# EAGLE board MMA8452Q_Breakout-Panel-v10 (EAGLE 6.5.0), part 1 of 2
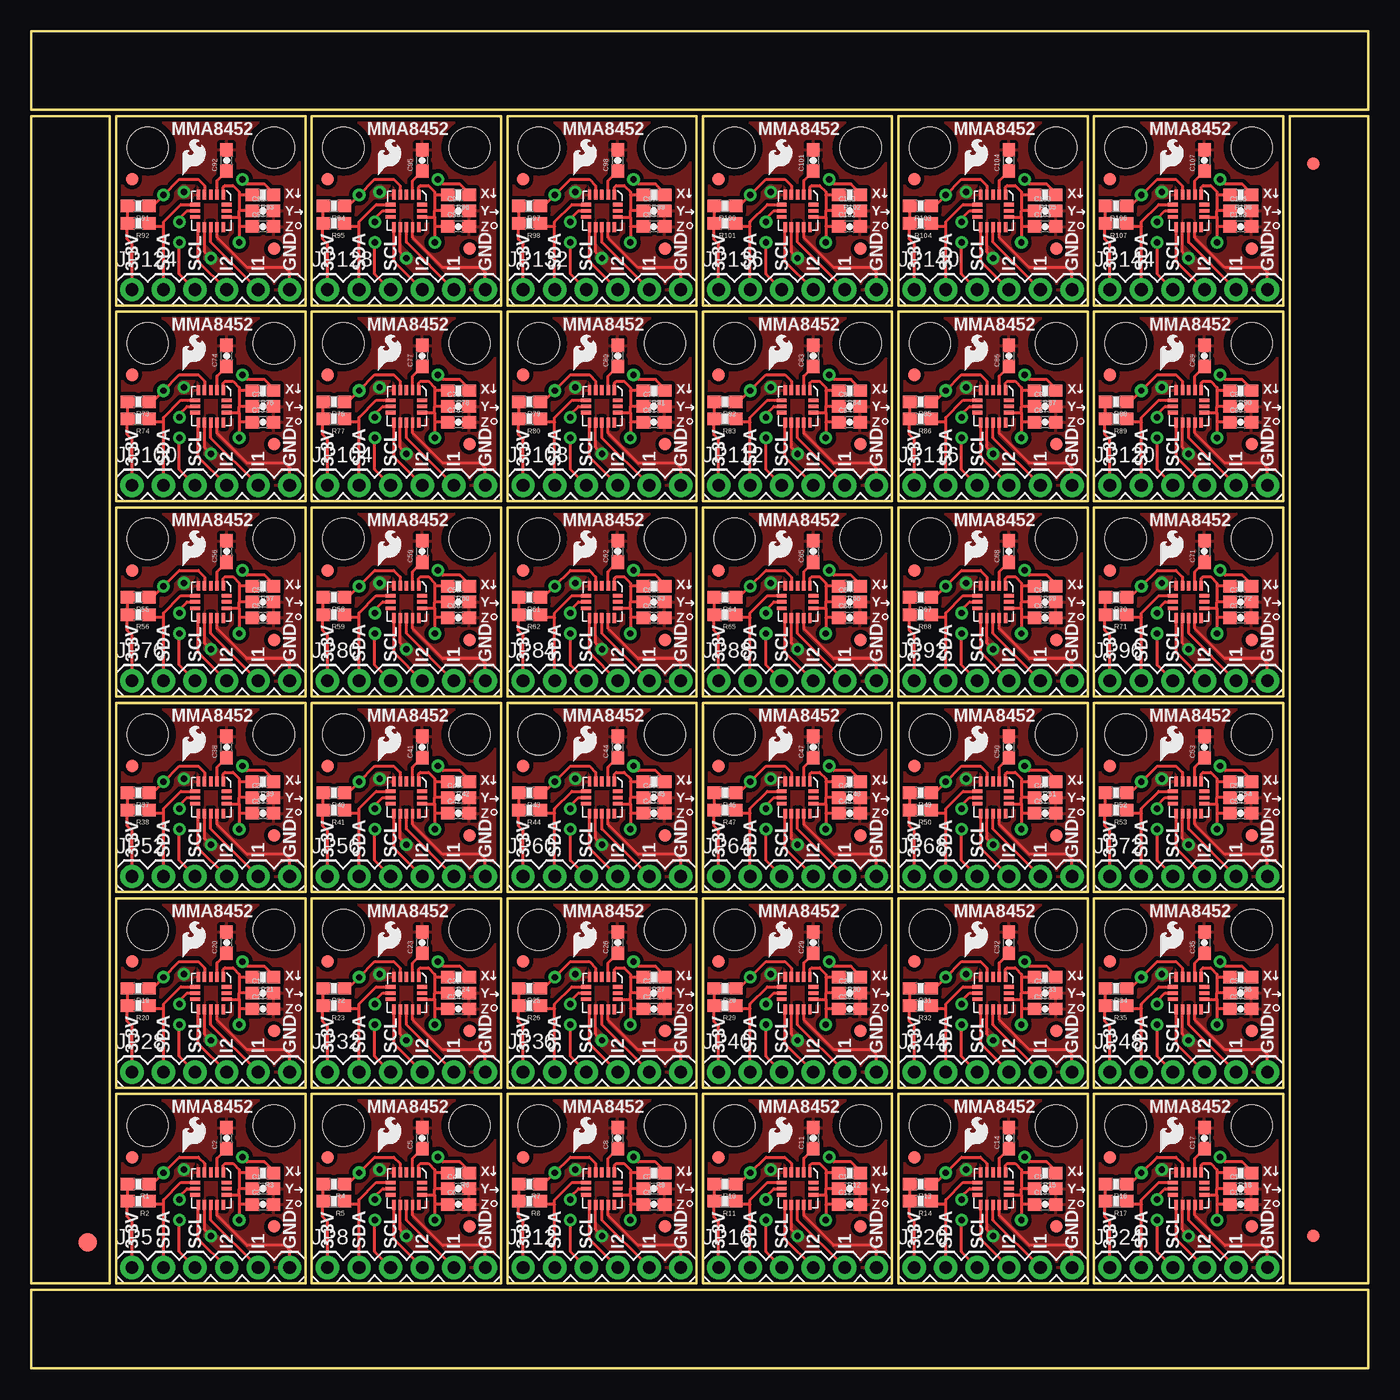
[diagram p0: board, top side]
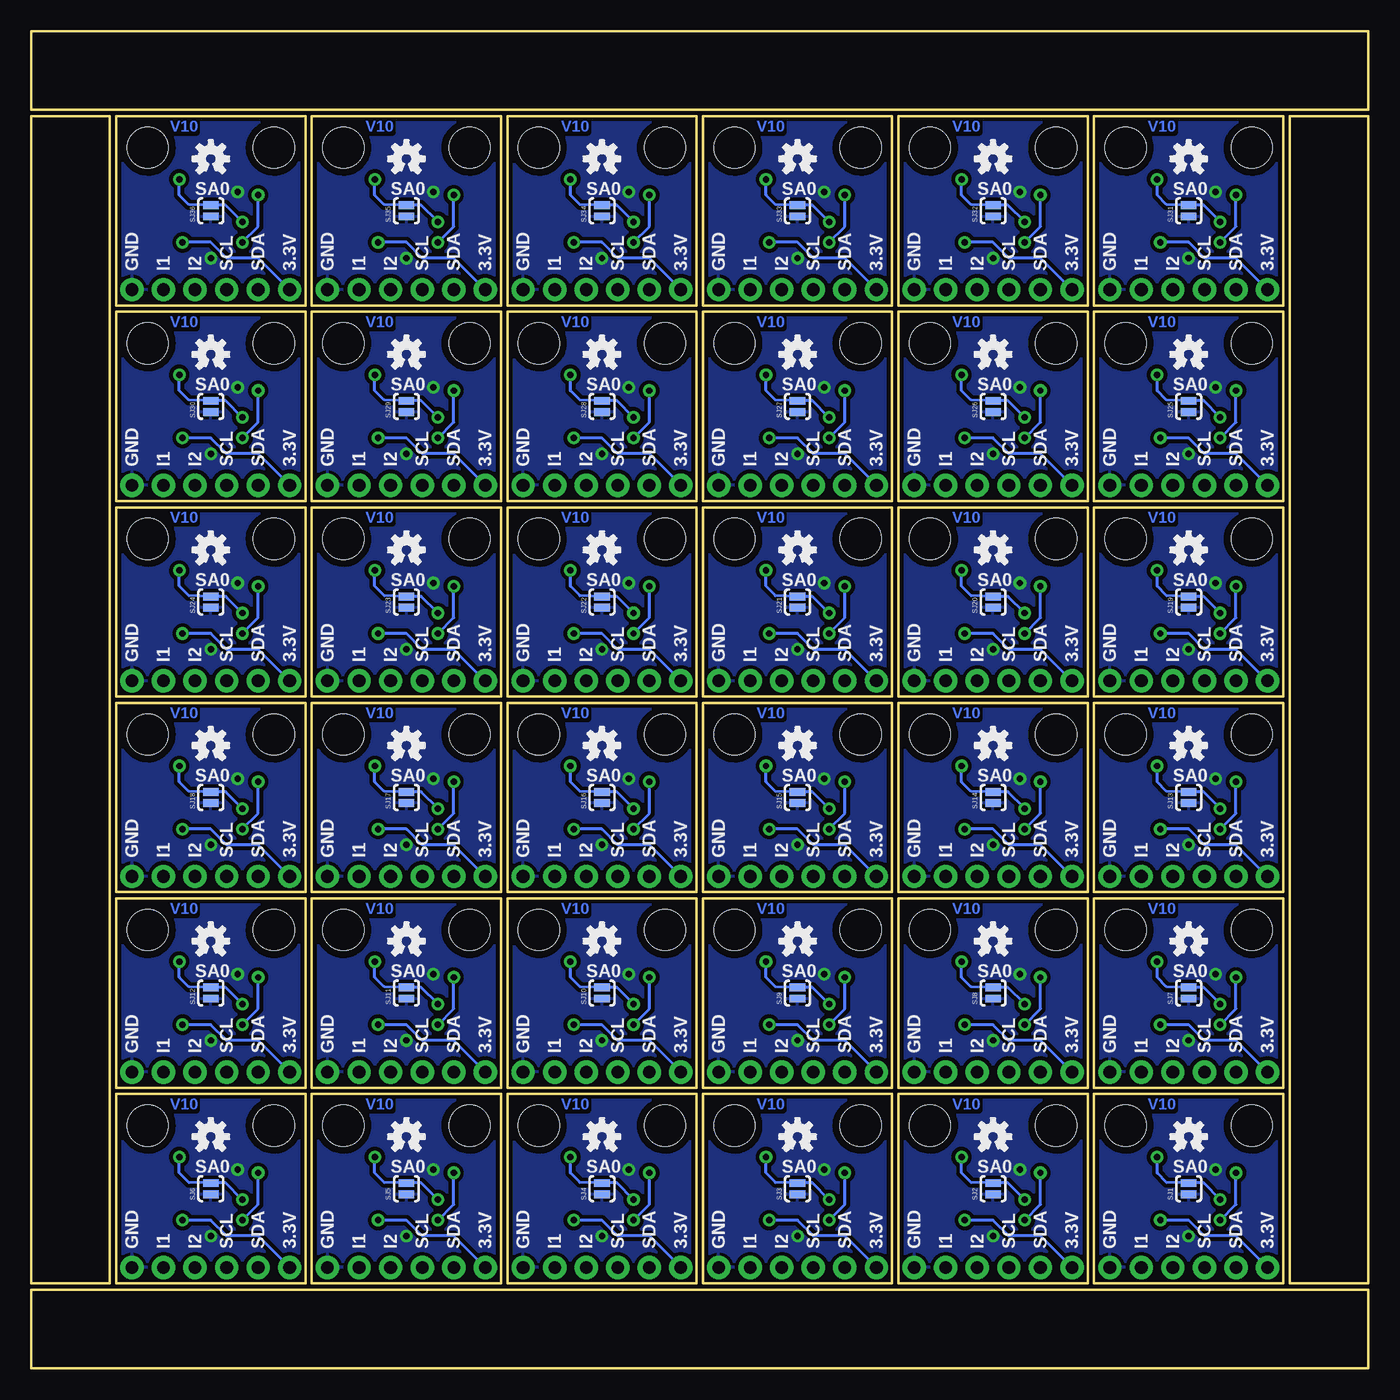
[diagram p1: board, bottom side, seen from below]

Size 107.7 x 107.7 mm. Coordinates in mm from the lower left corner, seen from the top.
Outline: 6.35,79.25 6.35,6.86 0,6.86 0,29.72
Outline: 79.25,0 0,0 0,6.35 29.72,6.35
Outline: 28.45,6.35 107.7,6.35 107.7,0 77.98,0
Outline: 107.7,79.25 107.7,6.86 101.35,6.86 101.35,29.72
Outline: 28.45,107.7 107.7,107.7 107.7,101.35 77.98,101.35
Outline: 101.35,28.45 101.35,100.84 107.7,100.84 107.7,77.98
Outline: 79.25,101.35 0,101.35 0,107.7 29.72,107.7
Outline: 0,28.45 0,100.84 6.35,100.84 6.35,77.98
Outline: 6.86,6.86 6.86,22.1 22.1,22.1 22.1,6.86 6.86,6.86
Outline: 22.61,6.86 22.61,22.1 37.85,22.1 37.85,6.86 22.61,6.86
Outline: 38.35,6.86 38.35,22.1 53.59,22.1 53.59,6.86 38.35,6.86
Outline: 54.1,6.86 54.1,22.1 69.34,22.1 69.34,6.86 54.1,6.86
Outline: 69.85,6.86 69.85,22.1 85.09,22.1 85.09,6.86 69.85,6.86
Outline: 85.6,6.86 85.6,22.1 100.84,22.1 100.84,6.86 85.6,6.86
Outline: 6.86,22.61 6.86,37.85 22.1,37.85 22.1,22.61 6.86,22.61
Outline: 22.61,22.61 22.61,37.85 37.85,37.85 37.85,22.61 22.61,22.61
Outline: 38.35,22.61 38.35,37.85 53.59,37.85 53.59,22.61 38.35,22.61
Outline: 54.1,22.61 54.1,37.85 69.34,37.85 69.34,22.61 54.1,22.61
Outline: 69.85,22.61 69.85,37.85 85.09,37.85 85.09,22.61 69.85,22.61
Outline: 85.6,22.61 85.6,37.85 100.84,37.85 100.84,22.61 85.6,22.61
Outline: 6.86,38.35 6.86,53.59 22.1,53.59 22.1,38.35 6.86,38.35
Outline: 22.61,38.35 22.61,53.59 37.85,53.59 37.85,38.35 22.61,38.35
Outline: 38.35,38.35 38.35,53.59 53.59,53.59 53.59,38.35 38.35,38.35
Outline: 54.1,38.35 54.1,53.59 69.34,53.59 69.34,38.35 54.1,38.35
Outline: 69.85,38.35 69.85,53.59 85.09,53.59 85.09,38.35 69.85,38.35
Outline: 85.6,38.35 85.6,53.59 100.84,53.59 100.84,38.35 85.6,38.35
Outline: 6.86,54.1 6.86,69.34 22.1,69.34 22.1,54.1 6.86,54.1
Outline: 22.61,54.1 22.61,69.34 37.85,69.34 37.85,54.1 22.61,54.1
Outline: 38.35,54.1 38.35,69.34 53.59,69.34 53.59,54.1 38.35,54.1
Outline: 54.1,54.1 54.1,69.34 69.34,69.34 69.34,54.1 54.1,54.1
Outline: 69.85,54.1 69.85,69.34 85.09,69.34 85.09,54.1 69.85,54.1
Outline: 85.6,54.1 85.6,69.34 100.84,69.34 100.84,54.1 85.6,54.1
Outline: 6.86,69.85 6.86,85.09 22.1,85.09 22.1,69.85 6.86,69.85
Outline: 22.61,69.85 22.61,85.09 37.85,85.09 37.85,69.85 22.61,69.85
Outline: 38.35,69.85 38.35,85.09 53.59,85.09 53.59,69.85 38.35,69.85
Outline: 54.1,69.85 54.1,85.09 69.34,85.09 69.34,69.85 54.1,69.85
Outline: 69.85,69.85 69.85,85.09 85.09,85.09 85.09,69.85 69.85,69.85
Outline: 85.6,69.85 85.6,85.09 100.84,85.09 100.84,69.85 85.6,69.85
Outline: 6.86,85.6 6.86,100.84 22.1,100.84 22.1,85.6 6.86,85.6
Outline: 22.61,85.6 22.61,100.84 37.85,100.84 37.85,85.6 22.61,85.6
Outline: 38.35,85.6 38.35,100.84 53.59,100.84 53.59,85.6 38.35,85.6
Outline: 54.1,85.6 54.1,100.84 69.34,100.84 69.34,85.6 54.1,85.6
Outline: 69.85,85.6 69.85,100.84 85.09,100.84 85.09,85.6 69.85,85.6
Outline: 85.6,85.6 85.6,100.84 100.84,100.84 100.84,85.6 85.6,85.6
Copper layers (1*16): Top 0.035mm / dielectric 1.5mm / Bottom 0.035mm
Design rules "SparkFun": minimum track width 8mil, minimum drill 20mil, track to track 8mil, track to pad 8mil, pad to pad 8mil, via to via 8mil, smd to smd 8mil, copper to edge 8mil, drill to drill 8mil, minimum pad ring 12mil, minimum via ring 10mil, stop-mask expansion 4mil, vias tented up to drill 20mil, thermal gap 10mil

## Footprints (pad centres in the part's own frame; a part is rotated, then mirrored left to right if it is on the bottom)
0603-CAP = smd 1.1 x 1: 1 -0.85,0; 2 0.85,0
FIDUCIAL-1.5X3 = smd 1.5 x 1.5: 1 0,0
FIDUCIAL-1X2 = smd 1 x 1: 1 0,0
STAND-OFF = hole 3.302: 0,0
1X06 = drill 1.016 pad 1.88: 1 0,0; 2 2.54,0; 3 5.08,0; 4 7.62,0; 5 10.16,0; 6 12.7,0
0603-RES = smd 1.1 x 1: 1 -0.85,0; 2 0.85,0
SJ_2S-NO = smd 0.635 x 1.27: 1 -0.45,0; 2 0.45,0
MMA8452Q-1:1 = smd 0.8 x 0.275: 1 -1.3,1; 2 -1.3,0.5; 3 -1.3,0; 4 -1.3,-0.5; 5 -1.3,-1; 9 1.3,-1; 10 1.3,-0.5; 11 1.3,0; 12 1.3,0.5; 13 1.3,1 | smd 0.29 x 0.8: 6 -0.5,-1.275; 7 0,-1.275; 8 0.5,-1.275; 14 0.5,1.275; 15 0,1.275; 16 -0.5,1.275

## Placement (x,y rotation side)
C1  0.1uF  [0603-CAP]  18.67,14.48 0 top
C2  0.1uF  [0603-CAP]  15.75,18.54 90 top
C3  4.7uF  [0603-CAP]  18.67,13.21 0 top
C4  0.1uF  [0603-CAP]  34.42,14.48 0 top
C5  0.1uF  [0603-CAP]  31.5,18.54 90 top
C6  4.7uF  [0603-CAP]  34.42,13.21 0 top
C7  0.1uF  [0603-CAP]  50.16,14.48 0 top
C8  0.1uF  [0603-CAP]  47.24,18.54 90 top
C9  4.7uF  [0603-CAP]  50.16,13.21 0 top
C10  0.1uF  [0603-CAP]  65.91,14.48 0 top
C11  0.1uF  [0603-CAP]  62.99,18.54 90 top
C12  4.7uF  [0603-CAP]  65.91,13.21 0 top
C13  0.1uF  [0603-CAP]  81.66,14.48 0 top
C14  0.1uF  [0603-CAP]  78.74,18.54 90 top
C15  4.7uF  [0603-CAP]  81.66,13.21 0 top
C16  0.1uF  [0603-CAP]  97.41,14.48 0 top
C17  0.1uF  [0603-CAP]  94.49,18.54 90 top
C18  4.7uF  [0603-CAP]  97.41,13.21 0 top
C19  0.1uF  [0603-CAP]  18.67,30.23 0 top
C20  0.1uF  [0603-CAP]  15.75,34.29 90 top
C21  4.7uF  [0603-CAP]  18.67,28.96 0 top
C22  0.1uF  [0603-CAP]  34.42,30.23 0 top
C23  0.1uF  [0603-CAP]  31.5,34.29 90 top
C24  4.7uF  [0603-CAP]  34.42,28.96 0 top
C25  0.1uF  [0603-CAP]  50.16,30.23 0 top
C26  0.1uF  [0603-CAP]  47.24,34.29 90 top
C27  4.7uF  [0603-CAP]  50.16,28.96 0 top
C28  0.1uF  [0603-CAP]  65.91,30.23 0 top
C29  0.1uF  [0603-CAP]  62.99,34.29 90 top
C30  4.7uF  [0603-CAP]  65.91,28.96 0 top
C31  0.1uF  [0603-CAP]  81.66,30.23 0 top
C32  0.1uF  [0603-CAP]  78.74,34.29 90 top
C33  4.7uF  [0603-CAP]  81.66,28.96 0 top
C34  0.1uF  [0603-CAP]  97.41,30.23 0 top
C35  0.1uF  [0603-CAP]  94.49,34.29 90 top
C36  4.7uF  [0603-CAP]  97.41,28.96 0 top
C37  0.1uF  [0603-CAP]  18.67,45.97 0 top
C38  0.1uF  [0603-CAP]  15.75,50.04 90 top
C39  4.7uF  [0603-CAP]  18.67,44.7 0 top
C40  0.1uF  [0603-CAP]  34.42,45.97 0 top
C41  0.1uF  [0603-CAP]  31.5,50.04 90 top
C42  4.7uF  [0603-CAP]  34.42,44.7 0 top
C43  0.1uF  [0603-CAP]  50.16,45.97 0 top
C44  0.1uF  [0603-CAP]  47.24,50.04 90 top
C45  4.7uF  [0603-CAP]  50.16,44.7 0 top
C46  0.1uF  [0603-CAP]  65.91,45.97 0 top
C47  0.1uF  [0603-CAP]  62.99,50.04 90 top
C48  4.7uF  [0603-CAP]  65.91,44.7 0 top
C49  0.1uF  [0603-CAP]  81.66,45.97 0 top
C50  0.1uF  [0603-CAP]  78.74,50.04 90 top
C51  4.7uF  [0603-CAP]  81.66,44.7 0 top
C52  0.1uF  [0603-CAP]  97.41,45.97 0 top
C53  0.1uF  [0603-CAP]  94.49,50.04 90 top
C54  4.7uF  [0603-CAP]  97.41,44.7 0 top
C55  0.1uF  [0603-CAP]  18.67,61.72 0 top
C56  0.1uF  [0603-CAP]  15.75,65.79 90 top
C57  4.7uF  [0603-CAP]  18.67,60.45 0 top
C58  0.1uF  [0603-CAP]  34.42,61.72 0 top
C59  0.1uF  [0603-CAP]  31.5,65.79 90 top
C60  4.7uF  [0603-CAP]  34.42,60.45 0 top
C61  0.1uF  [0603-CAP]  50.16,61.72 0 top
C62  0.1uF  [0603-CAP]  47.24,65.79 90 top
C63  4.7uF  [0603-CAP]  50.16,60.45 0 top
C64  0.1uF  [0603-CAP]  65.91,61.72 0 top
C65  0.1uF  [0603-CAP]  62.99,65.79 90 top
C66  4.7uF  [0603-CAP]  65.91,60.45 0 top
C67  0.1uF  [0603-CAP]  81.66,61.72 0 top
C68  0.1uF  [0603-CAP]  78.74,65.79 90 top
C69  4.7uF  [0603-CAP]  81.66,60.45 0 top
C70  0.1uF  [0603-CAP]  97.41,61.72 0 top
C71  0.1uF  [0603-CAP]  94.49,65.79 90 top
C72  4.7uF  [0603-CAP]  97.41,60.45 0 top
C73  0.1uF  [0603-CAP]  18.67,77.47 0 top
C74  0.1uF  [0603-CAP]  15.75,81.53 90 top
C75  4.7uF  [0603-CAP]  18.67,76.2 0 top
C76  0.1uF  [0603-CAP]  34.42,77.47 0 top
C77  0.1uF  [0603-CAP]  31.5,81.53 90 top
C78  4.7uF  [0603-CAP]  34.42,76.2 0 top
C79  0.1uF  [0603-CAP]  50.16,77.47 0 top
C80  0.1uF  [0603-CAP]  47.24,81.53 90 top
C81  4.7uF  [0603-CAP]  50.16,76.2 0 top
C82  0.1uF  [0603-CAP]  65.91,77.47 0 top
C83  0.1uF  [0603-CAP]  62.99,81.53 90 top
C84  4.7uF  [0603-CAP]  65.91,76.2 0 top
C85  0.1uF  [0603-CAP]  81.66,77.47 0 top
C86  0.1uF  [0603-CAP]  78.74,81.53 90 top
C87  4.7uF  [0603-CAP]  81.66,76.2 0 top
C88  0.1uF  [0603-CAP]  97.41,77.47 0 top
C89  0.1uF  [0603-CAP]  94.49,81.53 90 top
C90  4.7uF  [0603-CAP]  97.41,76.2 0 top
C91  0.1uF  [0603-CAP]  18.67,93.22 0 top
C92  0.1uF  [0603-CAP]  15.75,97.28 90 top
C93  4.7uF  [0603-CAP]  18.67,91.95 0 top
C94  0.1uF  [0603-CAP]  34.42,93.22 0 top
C95  0.1uF  [0603-CAP]  31.5,97.28 90 top
C96  4.7uF  [0603-CAP]  34.42,91.95 0 top
C97  0.1uF  [0603-CAP]  50.16,93.22 0 top
C98  0.1uF  [0603-CAP]  47.24,97.28 90 top
C99  4.7uF  [0603-CAP]  50.16,91.95 0 top
C100  0.1uF  [0603-CAP]  65.91,93.22 0 top
C101  0.1uF  [0603-CAP]  62.99,97.28 90 top
C102  4.7uF  [0603-CAP]  65.91,91.95 0 top
C103  0.1uF  [0603-CAP]  81.66,93.22 0 top
C104  0.1uF  [0603-CAP]  78.74,97.28 90 top
C105  4.7uF  [0603-CAP]  81.66,91.95 0 top
C106  0.1uF  [0603-CAP]  97.41,93.22 0 top
C107  0.1uF  [0603-CAP]  94.49,97.28 90 top
C108  4.7uF  [0603-CAP]  97.41,91.95 0 top
E$1  [FIDUCIAL-1.5X3]  4.57,10.16 0 top
E$4  [FIDUCIAL-1X2]  103.25,10.67 0 top
E$6  [FIDUCIAL-1X2]  103.25,97.03 180 top
FID1  FIDUCIAL1X2  [FIDUCIAL-1X2]  8.13,17.02 0 top
FID2  FIDUCIAL1X2  [FIDUCIAL-1X2]  19.56,11.43 0 top
FID3  FIDUCIAL1X2  [FIDUCIAL-1X2]  23.88,17.02 0 top
FID4  FIDUCIAL1X2  [FIDUCIAL-1X2]  35.31,11.43 0 top
FID5  FIDUCIAL1X2  [FIDUCIAL-1X2]  39.62,17.02 0 top
FID6  FIDUCIAL1X2  [FIDUCIAL-1X2]  51.05,11.43 0 top
FID7  FIDUCIAL1X2  [FIDUCIAL-1X2]  55.37,17.02 0 top
FID8  FIDUCIAL1X2  [FIDUCIAL-1X2]  66.8,11.43 0 top
FID9  FIDUCIAL1X2  [FIDUCIAL-1X2]  71.12,17.02 0 top
FID10  FIDUCIAL1X2  [FIDUCIAL-1X2]  82.55,11.43 0 top
FID11  FIDUCIAL1X2  [FIDUCIAL-1X2]  86.87,17.02 0 top
FID12  FIDUCIAL1X2  [FIDUCIAL-1X2]  98.3,11.43 0 top
FID13  FIDUCIAL1X2  [FIDUCIAL-1X2]  8.13,32.77 0 top
FID14  FIDUCIAL1X2  [FIDUCIAL-1X2]  19.56,27.18 0 top
FID15  FIDUCIAL1X2  [FIDUCIAL-1X2]  23.88,32.77 0 top
FID16  FIDUCIAL1X2  [FIDUCIAL-1X2]  35.31,27.18 0 top
FID17  FIDUCIAL1X2  [FIDUCIAL-1X2]  39.62,32.77 0 top
FID18  FIDUCIAL1X2  [FIDUCIAL-1X2]  51.05,27.18 0 top
FID19  FIDUCIAL1X2  [FIDUCIAL-1X2]  55.37,32.77 0 top
FID20  FIDUCIAL1X2  [FIDUCIAL-1X2]  66.8,27.18 0 top
FID21  FIDUCIAL1X2  [FIDUCIAL-1X2]  71.12,32.77 0 top
FID22  FIDUCIAL1X2  [FIDUCIAL-1X2]  82.55,27.18 0 top
FID23  FIDUCIAL1X2  [FIDUCIAL-1X2]  86.87,32.77 0 top
FID24  FIDUCIAL1X2  [FIDUCIAL-1X2]  98.3,27.18 0 top
FID25  FIDUCIAL1X2  [FIDUCIAL-1X2]  8.13,48.51 0 top
FID26  FIDUCIAL1X2  [FIDUCIAL-1X2]  19.56,42.93 0 top
FID27  FIDUCIAL1X2  [FIDUCIAL-1X2]  23.88,48.51 0 top
FID28  FIDUCIAL1X2  [FIDUCIAL-1X2]  35.31,42.93 0 top
FID29  FIDUCIAL1X2  [FIDUCIAL-1X2]  39.62,48.51 0 top
FID30  FIDUCIAL1X2  [FIDUCIAL-1X2]  51.05,42.93 0 top
FID31  FIDUCIAL1X2  [FIDUCIAL-1X2]  55.37,48.51 0 top
FID32  FIDUCIAL1X2  [FIDUCIAL-1X2]  66.8,42.93 0 top
FID33  FIDUCIAL1X2  [FIDUCIAL-1X2]  71.12,48.51 0 top
FID34  FIDUCIAL1X2  [FIDUCIAL-1X2]  82.55,42.93 0 top
FID35  FIDUCIAL1X2  [FIDUCIAL-1X2]  86.87,48.51 0 top
FID36  FIDUCIAL1X2  [FIDUCIAL-1X2]  98.3,42.93 0 top
FID37  FIDUCIAL1X2  [FIDUCIAL-1X2]  8.13,64.26 0 top
FID38  FIDUCIAL1X2  [FIDUCIAL-1X2]  19.56,58.67 0 top
FID39  FIDUCIAL1X2  [FIDUCIAL-1X2]  23.88,64.26 0 top
FID40  FIDUCIAL1X2  [FIDUCIAL-1X2]  35.31,58.67 0 top
FID41  FIDUCIAL1X2  [FIDUCIAL-1X2]  39.62,64.26 0 top
FID42  FIDUCIAL1X2  [FIDUCIAL-1X2]  51.05,58.67 0 top
FID43  FIDUCIAL1X2  [FIDUCIAL-1X2]  55.37,64.26 0 top
FID44  FIDUCIAL1X2  [FIDUCIAL-1X2]  66.8,58.67 0 top
FID45  FIDUCIAL1X2  [FIDUCIAL-1X2]  71.12,64.26 0 top
FID46  FIDUCIAL1X2  [FIDUCIAL-1X2]  82.55,58.67 0 top
FID47  FIDUCIAL1X2  [FIDUCIAL-1X2]  86.87,64.26 0 top
FID48  FIDUCIAL1X2  [FIDUCIAL-1X2]  98.3,58.67 0 top
FID49  FIDUCIAL1X2  [FIDUCIAL-1X2]  8.13,80.01 0 top
FID50  FIDUCIAL1X2  [FIDUCIAL-1X2]  19.56,74.42 0 top
FID51  FIDUCIAL1X2  [FIDUCIAL-1X2]  23.88,80.01 0 top
FID52  FIDUCIAL1X2  [FIDUCIAL-1X2]  35.31,74.42 0 top
FID53  FIDUCIAL1X2  [FIDUCIAL-1X2]  39.62,80.01 0 top
FID54  FIDUCIAL1X2  [FIDUCIAL-1X2]  51.05,74.42 0 top
FID55  FIDUCIAL1X2  [FIDUCIAL-1X2]  55.37,80.01 0 top
FID56  FIDUCIAL1X2  [FIDUCIAL-1X2]  66.8,74.42 0 top
FID57  FIDUCIAL1X2  [FIDUCIAL-1X2]  71.12,80.01 0 top
FID58  FIDUCIAL1X2  [FIDUCIAL-1X2]  82.55,74.42 0 top
FID59  FIDUCIAL1X2  [FIDUCIAL-1X2]  86.87,80.01 0 top
FID60  FIDUCIAL1X2  [FIDUCIAL-1X2]  98.3,74.42 0 top
FID61  FIDUCIAL1X2  [FIDUCIAL-1X2]  8.13,95.76 0 top
FID62  FIDUCIAL1X2  [FIDUCIAL-1X2]  19.56,90.17 0 top
FID63  FIDUCIAL1X2  [FIDUCIAL-1X2]  23.88,95.76 0 top
FID64  FIDUCIAL1X2  [FIDUCIAL-1X2]  35.31,90.17 0 top
FID65  FIDUCIAL1X2  [FIDUCIAL-1X2]  39.62,95.76 0 top
FID66  FIDUCIAL1X2  [FIDUCIAL-1X2]  51.05,90.17 0 top
FID67  FIDUCIAL1X2  [FIDUCIAL-1X2]  55.37,95.76 0 top
FID68  FIDUCIAL1X2  [FIDUCIAL-1X2]  66.8,90.17 0 top
FID69  FIDUCIAL1X2  [FIDUCIAL-1X2]  71.12,95.76 0 top
FID70  FIDUCIAL1X2  [FIDUCIAL-1X2]  82.55,90.17 0 top
FID71  FIDUCIAL1X2  [FIDUCIAL-1X2]  86.87,95.76 0 top
FID72  FIDUCIAL1X2  [FIDUCIAL-1X2]  98.3,90.17 0 top
JP1  LOGO-SFESK  [SFE-LOGO-FLAME]  12.19,17.4 0 top
JP2  LOGO-SFESK  [SFE-LOGO-FLAME]  27.94,17.4 0 top
JP3  STAND-OFF  [STAND-OFF]  9.4,19.56 0 top
JP4  STAND-OFF  [STAND-OFF]  19.56,19.56 0 top
JP5  [1X06]  8.13,8.13 0 top
JP6  STAND-OFF  [STAND-OFF]  25.15,19.56 0 top
JP7  STAND-OFF  [STAND-OFF]  35.31,19.56 0 top
JP8  [1X06]  23.88,8.13 0 top
JP9  LOGO-SFESK  [SFE-LOGO-FLAME]  43.69,17.4 0 top
JP10  STAND-OFF  [STAND-OFF]  40.89,19.56 0 top
JP11  STAND-OFF  [STAND-OFF]  51.05,19.56 0 top
JP12  [1X06]  39.62,8.13 0 top
JP13  LOGO-SFESK  [SFE-LOGO-FLAME]  59.44,17.4 0 top
JP14  STAND-OFF  [STAND-OFF]  56.64,19.56 0 top
JP15  STAND-OFF  [STAND-OFF]  66.8,19.56 0 top
JP16  [1X06]  55.37,8.13 0 top
JP17  LOGO-SFESK  [SFE-LOGO-FLAME]  75.18,17.4 0 top
JP18  STAND-OFF  [STAND-OFF]  72.39,19.56 0 top
JP19  STAND-OFF  [STAND-OFF]  82.55,19.56 0 top
JP20  [1X06]  71.12,8.13 0 top
JP21  LOGO-SFESK  [SFE-LOGO-FLAME]  90.93,17.4 0 top
JP22  STAND-OFF  [STAND-OFF]  88.14,19.56 0 top
JP23  STAND-OFF  [STAND-OFF]  98.3,19.56 0 top
JP24  [1X06]  86.87,8.13 0 top
JP25  LOGO-SFESK  [SFE-LOGO-FLAME]  12.19,33.15 0 top
JP26  STAND-OFF  [STAND-OFF]  9.4,35.31 0 top
JP27  STAND-OFF  [STAND-OFF]  19.56,35.31 0 top
JP28  [1X06]  8.13,23.88 0 top
JP29  LOGO-SFESK  [SFE-LOGO-FLAME]  27.94,33.15 0 top
JP30  STAND-OFF  [STAND-OFF]  25.15,35.31 0 top
JP31  STAND-OFF  [STAND-OFF]  35.31,35.31 0 top
JP32  [1X06]  23.88,23.88 0 top
JP33  LOGO-SFESK  [SFE-LOGO-FLAME]  43.69,33.15 0 top
JP34  STAND-OFF  [STAND-OFF]  40.89,35.31 0 top
JP35  STAND-OFF  [STAND-OFF]  51.05,35.31 0 top
JP36  [1X06]  39.62,23.88 0 top
JP37  LOGO-SFESK  [SFE-LOGO-FLAME]  59.44,33.15 0 top
JP38  STAND-OFF  [STAND-OFF]  56.64,35.31 0 top
JP39  STAND-OFF  [STAND-OFF]  66.8,35.31 0 top
JP40  [1X06]  55.37,23.88 0 top
JP41  LOGO-SFESK  [SFE-LOGO-FLAME]  75.18,33.15 0 top
JP42  STAND-OFF  [STAND-OFF]  72.39,35.31 0 top
JP43  STAND-OFF  [STAND-OFF]  82.55,35.31 0 top
JP44  [1X06]  71.12,23.88 0 top
JP45  LOGO-SFESK  [SFE-LOGO-FLAME]  90.93,33.15 0 top
JP46  STAND-OFF  [STAND-OFF]  88.14,35.31 0 top
JP47  STAND-OFF  [STAND-OFF]  98.3,35.31 0 top
JP48  [1X06]  86.87,23.88 0 top
JP49  LOGO-SFESK  [SFE-LOGO-FLAME]  12.19,48.9 0 top
JP50  STAND-OFF  [STAND-OFF]  9.4,51.05 0 top
JP51  STAND-OFF  [STAND-OFF]  19.56,51.05 0 top
JP52  [1X06]  8.13,39.62 0 top
JP53  LOGO-SFESK  [SFE-LOGO-FLAME]  27.94,48.9 0 top
JP54  STAND-OFF  [STAND-OFF]  25.15,51.05 0 top
JP55  STAND-OFF  [STAND-OFF]  35.31,51.05 0 top
JP56  [1X06]  23.88,39.62 0 top
JP57  LOGO-SFESK  [SFE-LOGO-FLAME]  43.69,48.9 0 top
JP58  STAND-OFF  [STAND-OFF]  40.89,51.05 0 top
JP59  STAND-OFF  [STAND-OFF]  51.05,51.05 0 top
JP60  [1X06]  39.62,39.62 0 top
JP61  LOGO-SFESK  [SFE-LOGO-FLAME]  59.44,48.9 0 top
JP62  STAND-OFF  [STAND-OFF]  56.64,51.05 0 top
JP63  STAND-OFF  [STAND-OFF]  66.8,51.05 0 top
JP64  [1X06]  55.37,39.62 0 top
JP65  LOGO-SFESK  [SFE-LOGO-FLAME]  75.18,48.9 0 top
JP66  STAND-OFF  [STAND-OFF]  72.39,51.05 0 top
JP67  STAND-OFF  [STAND-OFF]  82.55,51.05 0 top
JP68  [1X06]  71.12,39.62 0 top
JP69  LOGO-SFESK  [SFE-LOGO-FLAME]  90.93,48.9 0 top
JP70  STAND-OFF  [STAND-OFF]  88.14,51.05 0 top
JP71  STAND-OFF  [STAND-OFF]  98.3,51.05 0 top
JP72  [1X06]  86.87,39.62 0 top
JP73  LOGO-SFESK  [SFE-LOGO-FLAME]  12.19,64.64 0 top
JP74  STAND-OFF  [STAND-OFF]  9.4,66.8 0 top
JP75  STAND-OFF  [STAND-OFF]  19.56,66.8 0 top
JP76  [1X06]  8.13,55.37 0 top
JP77  LOGO-SFESK  [SFE-LOGO-FLAME]  27.94,64.64 0 top
JP78  STAND-OFF  [STAND-OFF]  25.15,66.8 0 top
JP79  STAND-OFF  [STAND-OFF]  35.31,66.8 0 top
JP80  [1X06]  23.88,55.37 0 top
JP81  LOGO-SFESK  [SFE-LOGO-FLAME]  43.69,64.64 0 top
JP82  STAND-OFF  [STAND-OFF]  40.89,66.8 0 top
JP83  STAND-OFF  [STAND-OFF]  51.05,66.8 0 top
JP84  [1X06]  39.62,55.37 0 top
JP85  LOGO-SFESK  [SFE-LOGO-FLAME]  59.44,64.64 0 top
JP86  STAND-OFF  [STAND-OFF]  56.64,66.8 0 top
JP87  STAND-OFF  [STAND-OFF]  66.8,66.8 0 top
JP88  [1X06]  55.37,55.37 0 top
JP89  LOGO-SFESK  [SFE-LOGO-FLAME]  75.18,64.64 0 top
JP90  STAND-OFF  [STAND-OFF]  72.39,66.8 0 top
JP91  STAND-OFF  [STAND-OFF]  82.55,66.8 0 top
JP92  [1X06]  71.12,55.37 0 top
JP93  LOGO-SFESK  [SFE-LOGO-FLAME]  90.93,64.64 0 top
JP94  STAND-OFF  [STAND-OFF]  88.14,66.8 0 top
JP95  STAND-OFF  [STAND-OFF]  98.3,66.8 0 top
JP96  [1X06]  86.87,55.37 0 top
JP97  LOGO-SFESK  [SFE-LOGO-FLAME]  12.19,80.39 0 top
JP98  STAND-OFF  [STAND-OFF]  9.4,82.55 0 top
JP99  STAND-OFF  [STAND-OFF]  19.56,82.55 0 top
JP100  [1X06]  8.13,71.12 0 top
JP101  LOGO-SFESK  [SFE-LOGO-FLAME]  27.94,80.39 0 top
JP102  STAND-OFF  [STAND-OFF]  25.15,82.55 0 top
JP103  STAND-OFF  [STAND-OFF]  35.31,82.55 0 top
JP104  [1X06]  23.88,71.12 0 top
JP105  LOGO-SFESK  [SFE-LOGO-FLAME]  43.69,80.39 0 top
JP106  STAND-OFF  [STAND-OFF]  40.89,82.55 0 top
JP107  STAND-OFF  [STAND-OFF]  51.05,82.55 0 top
JP108  [1X06]  39.62,71.12 0 top
JP109  LOGO-SFESK  [SFE-LOGO-FLAME]  59.44,80.39 0 top
JP110  STAND-OFF  [STAND-OFF]  56.64,82.55 0 top
JP111  STAND-OFF  [STAND-OFF]  66.8,82.55 0 top
JP112  [1X06]  55.37,71.12 0 top
JP113  LOGO-SFESK  [SFE-LOGO-FLAME]  75.18,80.39 0 top
JP114  STAND-OFF  [STAND-OFF]  72.39,82.55 0 top
JP115  STAND-OFF  [STAND-OFF]  82.55,82.55 0 top
JP116  [1X06]  71.12,71.12 0 top
JP117  LOGO-SFESK  [SFE-LOGO-FLAME]  90.93,80.39 0 top
JP118  STAND-OFF  [STAND-OFF]  88.14,82.55 0 top
JP119  STAND-OFF  [STAND-OFF]  98.3,82.55 0 top
JP120  [1X06]  86.87,71.12 0 top
JP121  LOGO-SFESK  [SFE-LOGO-FLAME]  12.19,96.14 0 top
JP122  STAND-OFF  [STAND-OFF]  9.4,98.3 0 top
JP123  STAND-OFF  [STAND-OFF]  19.56,98.3 0 top
JP124  [1X06]  8.13,86.87 0 top
JP125  LOGO-SFESK  [SFE-LOGO-FLAME]  27.94,96.14 0 top
JP126  STAND-OFF  [STAND-OFF]  25.15,98.3 0 top
JP127  STAND-OFF  [STAND-OFF]  35.31,98.3 0 top
JP128  [1X06]  23.88,86.87 0 top
JP129  LOGO-SFESK  [SFE-LOGO-FLAME]  43.69,96.14 0 top
JP130  STAND-OFF  [STAND-OFF]  40.89,98.3 0 top
JP131  STAND-OFF  [STAND-OFF]  51.05,98.3 0 top
JP132  [1X06]  39.62,86.87 0 top
JP133  LOGO-SFESK  [SFE-LOGO-FLAME]  59.44,96.14 0 top
JP134  STAND-OFF  [STAND-OFF]  56.64,98.3 0 top
JP135  STAND-OFF  [STAND-OFF]  66.8,98.3 0 top
JP136  [1X06]  55.37,86.87 0 top
JP137  LOGO-SFESK  [SFE-LOGO-FLAME]  75.18,96.14 0 top
JP138  STAND-OFF  [STAND-OFF]  72.39,98.3 0 top
JP139  STAND-OFF  [STAND-OFF]  82.55,98.3 0 top
JP140  [1X06]  71.12,86.87 0 top
JP141  LOGO-SFESK  [SFE-LOGO-FLAME]  90.93,96.14 0 top
JP142  STAND-OFF  [STAND-OFF]  88.14,98.3 0 top
JP143  STAND-OFF  [STAND-OFF]  98.3,98.3 0 top
JP144  [1X06]  86.87,86.87 0 top
R1  10k  [0603-RES]  8.64,14.86 180 top
R2  10k  [0603-RES]  8.64,13.46 180 top
R3  10k  [0603-RES]  18.67,15.75 180 top
R4  10k  [0603-RES]  24.38,14.86 180 top
R5  10k  [0603-RES]  24.38,13.46 180 top
R6  10k  [0603-RES]  34.42,15.75 180 top
R7  10k  [0603-RES]  40.13,14.86 180 top
R8  10k  [0603-RES]  40.13,13.46 180 top
R9  10k  [0603-RES]  50.16,15.75 180 top
R10  10k  [0603-RES]  55.88,14.86 180 top
R11  10k  [0603-RES]  55.88,13.46 180 top
R12  10k  [0603-RES]  65.91,15.75 180 top
R13  10k  [0603-RES]  71.63,14.86 180 top
R14  10k  [0603-RES]  71.63,13.46 180 top
R15  10k  [0603-RES]  81.66,15.75 180 top
R16  10k  [0603-RES]  87.38,14.86 180 top
R17  10k  [0603-RES]  87.38,13.46 180 top
R18  10k  [0603-RES]  97.41,15.75 180 top
R19  10k  [0603-RES]  8.64,30.61 180 top
R20  10k  [0603-RES]  8.64,29.21 180 top
R21  10k  [0603-RES]  18.67,31.5 180 top
R22  10k  [0603-RES]  24.38,30.61 180 top
R23  10k  [0603-RES]  24.38,29.21 180 top
R24  10k  [0603-RES]  34.42,31.5 180 top
R25  10k  [0603-RES]  40.13,30.61 180 top
R26  10k  [0603-RES]  40.13,29.21 180 top
R27  10k  [0603-RES]  50.16,31.5 180 top
R28  10k  [0603-RES]  55.88,30.61 180 top
R29  10k  [0603-RES]  55.88,29.21 180 top
R30  10k  [0603-RES]  65.91,31.5 180 top
R31  10k  [0603-RES]  71.63,30.61 180 top
R32  10k  [0603-RES]  71.63,29.21 180 top
R33  10k  [0603-RES]  81.66,31.5 180 top
R34  10k  [0603-RES]  87.38,30.61 180 top
R35  10k  [0603-RES]  87.38,29.21 180 top
R36  10k  [0603-RES]  97.41,31.5 180 top
R37  10k  [0603-RES]  8.64,46.35 180 top
R38  10k  [0603-RES]  8.64,44.96 180 top
R39  10k  [0603-RES]  18.67,47.24 180 top
R40  10k  [0603-RES]  24.38,46.35 180 top
R41  10k  [0603-RES]  24.38,44.96 180 top
R42  10k  [0603-RES]  34.42,47.24 180 top
R43  10k  [0603-RES]  40.13,46.35 180 top
R44  10k  [0603-RES]  40.13,44.96 180 top
R45  10k  [0603-RES]  50.16,47.24 180 top
R46  10k  [0603-RES]  55.88,46.35 180 top
R47  10k  [0603-RES]  55.88,44.96 180 top
R48  10k  [0603-RES]  65.91,47.24 180 top
R49  10k  [0603-RES]  71.63,46.35 180 top
R50  10k  [0603-RES]  71.63,44.96 180 top
R51  10k  [0603-RES]  81.66,47.24 180 top
R52  10k  [0603-RES]  87.38,46.35 180 top
R53  10k  [0603-RES]  87.38,44.96 180 top
R54  10k  [0603-RES]  97.41,47.24 180 top
R55  10k  [0603-RES]  8.64,62.1 180 top
R56  10k  [0603-RES]  8.64,60.71 180 top
R57  10k  [0603-RES]  18.67,62.99 180 top
R58  10k  [0603-RES]  24.38,62.1 180 top
R59  10k  [0603-RES]  24.38,60.71 180 top
R60  10k  [0603-RES]  34.42,62.99 180 top
R61  10k  [0603-RES]  40.13,62.1 180 top
R62  10k  [0603-RES]  40.13,60.71 180 top
R63  10k  [0603-RES]  50.16,62.99 180 top
R64  10k  [0603-RES]  55.88,62.1 180 top
R65  10k  [0603-RES]  55.88,60.71 180 top
R66  10k  [0603-RES]  65.91,62.99 180 top
R67  10k  [0603-RES]  71.63,62.1 180 top
R68  10k  [0603-RES]  71.63,60.71 180 top
R69  10k  [0603-RES]  81.66,62.99 180 top
R70  10k  [0603-RES]  87.38,62.1 180 top
R71  10k  [0603-RES]  87.38,60.71 180 top
R72  10k  [0603-RES]  97.41,62.99 180 top
R73  10k  [0603-RES]  8.64,77.85 180 top
R74  10k  [0603-RES]  8.64,76.45 180 top
R75  10k  [0603-RES]  18.67,78.74 180 top
R76  10k  [0603-RES]  24.38,77.85 180 top
R77  10k  [0603-RES]  24.38,76.45 180 top
R78  10k  [0603-RES]  34.42,78.74 180 top
R79  10k  [0603-RES]  40.13,77.85 180 top
R80  10k  [0603-RES]  40.13,76.45 180 top
R81  10k  [0603-RES]  50.16,78.74 180 top
R82  10k  [0603-RES]  55.88,77.85 180 top
R83  10k  [0603-RES]  55.88,76.45 180 top
R84  10k  [0603-RES]  65.91,78.74 180 top
R85  10k  [0603-RES]  71.63,77.85 180 top
R86  10k  [0603-RES]  71.63,76.45 180 top
R87  10k  [0603-RES]  81.66,78.74 180 top
R88  10k  [0603-RES]  87.38,77.85 180 top
R89  10k  [0603-RES]  87.38,76.45 180 top
R90  10k  [0603-RES]  97.41,78.74 180 top
R91  10k  [0603-RES]  8.64,93.6 180 top
R92  10k  [0603-RES]  8.64,92.2 180 top
R93  10k  [0603-RES]  18.67,94.49 180 top
R94  10k  [0603-RES]  24.38,93.6 180 top
R95  10k  [0603-RES]  24.38,92.2 180 top
R96  10k  [0603-RES]  34.42,94.49 180 top
R97  10k  [0603-RES]  40.13,93.6 180 top
R98  10k  [0603-RES]  40.13,92.2 180 top
R99  10k  [0603-RES]  50.16,94.49 180 top
R100  10k  [0603-RES]  55.88,93.6 180 top
R101  10k  [0603-RES]  55.88,92.2 180 top
R102  10k  [0603-RES]  65.91,94.49 180 top
R103  10k  [0603-RES]  71.63,93.6 180 top
R104  10k  [0603-RES]  71.63,92.2 180 top
R105  10k  [0603-RES]  81.66,94.49 180 top
R106  10k  [0603-RES]  87.38,93.6 180 top
R107  10k  [0603-RES]  87.38,92.2 180 top
R108  10k  [0603-RES]  97.41,94.49 180 top
SJ1  [SJ_2S-NO]  14.48,14.48 90 bottom
SJ2  [SJ_2S-NO]  30.23,14.48 90 bottom
SJ3  [SJ_2S-NO]  45.97,14.48 90 bottom
SJ4  [SJ_2S-NO]  61.72,14.48 90 bottom
SJ5  [SJ_2S-NO]  77.47,14.48 90 bottom
SJ6  [SJ_2S-NO]  93.22,14.48 90 bottom
SJ7  [SJ_2S-NO]  14.48,30.23 90 bottom
SJ8  [SJ_2S-NO]  30.23,30.23 90 bottom
SJ9  [SJ_2S-NO]  45.97,30.23 90 bottom
SJ10  [SJ_2S-NO]  61.72,30.23 90 bottom
SJ11  [SJ_2S-NO]  77.47,30.23 90 bottom
SJ12  [SJ_2S-NO]  93.22,30.23 90 bottom
SJ13  [SJ_2S-NO]  14.48,45.97 90 bottom
SJ14  [SJ_2S-NO]  30.23,45.97 90 bottom
SJ15  [SJ_2S-NO]  45.97,45.97 90 bottom
SJ16  [SJ_2S-NO]  61.72,45.97 90 bottom
SJ17  [SJ_2S-NO]  77.47,45.97 90 bottom
SJ18  [SJ_2S-NO]  93.22,45.97 90 bottom
SJ19  [SJ_2S-NO]  14.48,61.72 90 bottom
SJ20  [SJ_2S-NO]  30.23,61.72 90 bottom
SJ21  [SJ_2S-NO]  45.97,61.72 90 bottom
SJ22  [SJ_2S-NO]  61.72,61.72 90 bottom
SJ23  [SJ_2S-NO]  77.47,61.72 90 bottom
SJ24  [SJ_2S-NO]  93.22,61.72 90 bottom
SJ25  [SJ_2S-NO]  14.48,77.47 90 bottom
SJ26  [SJ_2S-NO]  30.23,77.47 90 bottom
SJ27  [SJ_2S-NO]  45.97,77.47 90 bottom
SJ28  [SJ_2S-NO]  61.72,77.47 90 bottom
SJ29  [SJ_2S-NO]  77.47,77.47 90 bottom
SJ30  [SJ_2S-NO]  93.22,77.47 90 bottom
SJ31  [SJ_2S-NO]  14.48,93.22 90 bottom
SJ32  [SJ_2S-NO]  30.23,93.22 90 bottom
SJ33  [SJ_2S-NO]  45.97,93.22 90 bottom
SJ34  [SJ_2S-NO]  61.72,93.22 90 bottom
SJ35  [SJ_2S-NO]  77.47,93.22 90 bottom
SJ36  [SJ_2S-NO]  93.22,93.22 90 bottom
U1  MMA8452QMMA8452Q-1:1  [MMA8452Q-1:1]  14.48,14.48 270 top
U2  MMA8452QMMA8452Q-1:1  [MMA8452Q-1:1]  30.23,14.48 270 top
U3  MMA8452QMMA8452Q-1:1  [MMA8452Q-1:1]  45.97,14.48 270 top
U4  MMA8452QMMA8452Q-1:1  [MMA8452Q-1:1]  61.72,14.48 270 top
U5  MMA8452QMMA8452Q-1:1  [MMA8452Q-1:1]  77.47,14.48 270 top
U6  MMA8452QMMA8452Q-1:1  [MMA8452Q-1:1]  93.22,14.48 270 top
U7  MMA8452QMMA8452Q-1:1  [MMA8452Q-1:1]  14.48,30.23 270 top
U8  MMA8452QMMA8452Q-1:1  [MMA8452Q-1:1]  30.23,30.23 270 top
U9  MMA8452QMMA8452Q-1:1  [MMA8452Q-1:1]  45.97,30.23 270 top
U10  MMA8452QMMA8452Q-1:1  [MMA8452Q-1:1]  61.72,30.23 270 top
U11  MMA8452QMMA8452Q-1:1  [MMA8452Q-1:1]  77.47,30.23 270 top
U12  MMA8452QMMA8452Q-1:1  [MMA8452Q-1:1]  93.22,30.23 270 top
U13  MMA8452QMMA8452Q-1:1  [MMA8452Q-1:1]  14.48,45.97 270 top
U14  MMA8452QMMA8452Q-1:1  [MMA8452Q-1:1]  30.23,45.97 270 top
U15  MMA8452QMMA8452Q-1:1  [MMA8452Q-1:1]  45.97,45.97 270 top
U16  MMA8452QMMA8452Q-1:1  [MMA8452Q-1:1]  61.72,45.97 270 top
U17  MMA8452QMMA8452Q-1:1  [MMA8452Q-1:1]  77.47,45.97 270 top
U18  MMA8452QMMA8452Q-1:1  [MMA8452Q-1:1]  93.22,45.97 270 top
U19  MMA8452QMMA8452Q-1:1  [MMA8452Q-1:1]  14.48,61.72 270 top
U20  MMA8452QMMA8452Q-1:1  [MMA8452Q-1:1]  30.23,61.72 270 top
U21  MMA8452QMMA8452Q-1:1  [MMA8452Q-1:1]  45.97,61.72 270 top
U22  MMA8452QMMA8452Q-1:1  [MMA8452Q-1:1]  61.72,61.72 270 top
U23  MMA8452QMMA8452Q-1:1  [MMA8452Q-1:1]  77.47,61.72 270 top
U24  MMA8452QMMA8452Q-1:1  [MMA8452Q-1:1]  93.22,61.72 270 top
U25  MMA8452QMMA8452Q-1:1  [MMA8452Q-1:1]  14.48,77.47 270 top
U26  MMA8452QMMA8452Q-1:1  [MMA8452Q-1:1]  30.23,77.47 270 top
U27  MMA8452QMMA8452Q-1:1  [MMA8452Q-1:1]  45.97,77.47 270 top
U28  MMA8452QMMA8452Q-1:1  [MMA8452Q-1:1]  61.72,77.47 270 top
U29  MMA8452QMMA8452Q-1:1  [MMA8452Q-1:1]  77.47,77.47 270 top
U30  MMA8452QMMA8452Q-1:1  [MMA8452Q-1:1]  93.22,77.47 270 top
U31  MMA8452QMMA8452Q-1:1  [MMA8452Q-1:1]  14.48,93.22 270 top
U32  MMA8452QMMA8452Q-1:1  [MMA8452Q-1:1]  30.23,93.22 270 top
U33  MMA8452QMMA8452Q-1:1  [MMA8452Q-1:1]  45.97,93.22 270 top
U34  MMA8452QMMA8452Q-1:1  [MMA8452Q-1:1]  61.72,93.22 270 top
U35  MMA8452QMMA8452Q-1:1  [MMA8452Q-1:1]  77.47,93.22 270 top
U36  MMA8452QMMA8452Q-1:1  [MMA8452Q-1:1]  93.22,93.22 270 top
U$1  OSHW-LOGOS  [OSHW-LOGO-S]  14.48,18.67 0 bottom
U$2  OSHW-LOGOS  [OSHW-LOGO-S]  30.23,18.67 0 bottom
U$3  OSHW-LOGOS  [OSHW-LOGO-S]  45.97,18.67 0 bottom
U$4  OSHW-LOGOS  [OSHW-LOGO-S]  61.72,18.67 0 bottom
U$5  OSHW-LOGOS  [OSHW-LOGO-S]  77.47,18.67 0 bottom
U$6  OSHW-LOGOS  [OSHW-LOGO-S]  93.22,18.67 0 bottom
U$7  OSHW-LOGOS  [OSHW-LOGO-S]  14.48,34.42 0 bottom
U$8  OSHW-LOGOS  [OSHW-LOGO-S]  30.23,34.42 0 bottom
U$9  OSHW-LOGOS  [OSHW-LOGO-S]  45.97,34.42 0 bottom
U$10  OSHW-LOGOS  [OSHW-LOGO-S]  61.72,34.42 0 bottom
U$11  OSHW-LOGOS  [OSHW-LOGO-S]  77.47,34.42 0 bottom
U$12  OSHW-LOGOS  [OSHW-LOGO-S]  93.22,34.42 0 bottom
U$13  OSHW-LOGOS  [OSHW-LOGO-S]  14.48,50.16 0 bottom
U$14  OSHW-LOGOS  [OSHW-LOGO-S]  30.23,50.16 0 bottom
U$15  OSHW-LOGOS  [OSHW-LOGO-S]  45.97,50.16 0 bottom
U$16  OSHW-LOGOS  [OSHW-LOGO-S]  61.72,50.16 0 bottom
U$17  OSHW-LOGOS  [OSHW-LOGO-S]  77.47,50.16 0 bottom
U$18  OSHW-LOGOS  [OSHW-LOGO-S]  93.22,50.16 0 bottom
U$19  OSHW-LOGOS  [OSHW-LOGO-S]  14.48,65.91 0 bottom
U$20  OSHW-LOGOS  [OSHW-LOGO-S]  30.23,65.91 0 bottom
U$21  OSHW-LOGOS  [OSHW-LOGO-S]  45.97,65.91 0 bottom
U$22  OSHW-LOGOS  [OSHW-LOGO-S]  61.72,65.91 0 bottom
U$23  OSHW-LOGOS  [OSHW-LOGO-S]  77.47,65.91 0 bottom
U$24  OSHW-LOGOS  [OSHW-LOGO-S]  93.22,65.91 0 bottom
U$25  OSHW-LOGOS  [OSHW-LOGO-S]  14.48,81.66 0 bottom
U$26  OSHW-LOGOS  [OSHW-LOGO-S]  30.23,81.66 0 bottom
U$27  OSHW-LOGOS  [OSHW-LOGO-S]  45.97,81.66 0 bottom
U$28  OSHW-LOGOS  [OSHW-LOGO-S]  61.72,81.66 0 bottom
U$29  OSHW-LOGOS  [OSHW-LOGO-S]  77.47,81.66 0 bottom
U$30  OSHW-LOGOS  [OSHW-LOGO-S]  93.22,81.66 0 bottom
U$31  OSHW-LOGOS  [OSHW-LOGO-S]  14.48,97.41 0 bottom
U$32  OSHW-LOGOS  [OSHW-LOGO-S]  30.23,97.41 0 bottom
U$33  OSHW-LOGOS  [OSHW-LOGO-S]  45.97,97.41 0 bottom
U$34  OSHW-LOGOS  [OSHW-LOGO-S]  61.72,97.41 0 bottom
U$35  OSHW-LOGOS  [OSHW-LOGO-S]  77.47,97.41 0 bottom
U$36  OSHW-LOGOS  [OSHW-LOGO-S]  93.22,97.41 0 bottom

## Library data of the parts
C1 C2 C4 C5 C7 C8 C10 C11 C13 C14 C16 C17 C19 C20 C22 C23 C25 C26 C28 C29 C31 C32 C34 C35 C37 C38 C40 C41 C43 C44 C46 C47 C49 C50 C52 C53 C55 C56 C58 C59 C61 C62 C64 C65 C67 C68 C70 C71 C73 C74 C76 C77 C79 C80 C82 C83 C85 C86 C88 C89 C91 C92 C94 C95 C97 C98 C100 C101 C103 C104 C106 C107 = SparkFun-Capacitors; PROD_ID: CAP-00810
C3 C6 C9 C12 C15 C18 C21 C24 C27 C30 C33 C36 C39 C42 C45 C48 C51 C54 C57 C60 C63 C66 C69 C72 C75 C78 C81 C84 C87 C90 C93 C96 C99 C102 C105 C108 = SparkFun-Capacitors; PROD_ID: CAP-08280
E$1 E$4 E$6 FID1-FID72 = SparkFun-Aesthetics
JP1-JP144 SJ1-SJ36 U$1-U$36 = SparkFun
R1-R108 = SparkFun-Resistors; PROD_ID: RES-00824
U1-U36 = SparkFun-Sensors

## Nets
3.3V: C1.1 C3.1 JP5.1 R1.2 R2.2 R3.2 U1.1 U1.14
3.3V1: C4.1 C6.1 JP8.1 R4.2 R5.2 R6.2 U2.1 U2.14
3.3V2: C7.1 C9.1 JP12.1 R7.2 R8.2 R9.2 U3.1 U3.14
3.3V3: C10.1 C12.1 JP16.1 R10.2 R11.2 R12.2 U4.1 U4.14
3.3V4: C13.1 C15.1 JP20.1 R13.2 R14.2 R15.2 U5.1 U5.14
3.3V5: C16.1 C18.1 JP24.1 R16.2 R17.2 R18.2 U6.1 U6.14
3.3V6: C19.1 C21.1 JP28.1 R19.2 R20.2 R21.2 U7.1 U7.14
3.3V7: C22.1 C24.1 JP32.1 R22.2 R23.2 R24.2 U8.1 U8.14
3.3V8: C25.1 C27.1 JP36.1 R25.2 R26.2 R27.2 U9.1 U9.14
3.3V9: C28.1 C30.1 JP40.1 R28.2 R29.2 R30.2 U10.1 U10.14
3.3V10: C31.1 C33.1 JP44.1 R31.2 R32.2 R33.2 U11.1 U11.14
3.3V11: C34.1 C36.1 JP48.1 R34.2 R35.2 R36.2 U12.1 U12.14
3.3V12: C37.1 C39.1 JP52.1 R37.2 R38.2 R39.2 U13.1 U13.14
3.3V13: C40.1 C42.1 JP56.1 R40.2 R41.2 R42.2 U14.1 U14.14
3.3V14: C43.1 C45.1 JP60.1 R43.2 R44.2 R45.2 U15.1 U15.14
3.3V15: C46.1 C48.1 JP64.1 R46.2 R47.2 R48.2 U16.1 U16.14
3.3V16: C49.1 C51.1 JP68.1 R49.2 R50.2 R51.2 U17.1 U17.14
3.3V17: C52.1 C54.1 JP72.1 R52.2 R53.2 R54.2 U18.1 U18.14
3.3V18: C55.1 C57.1 JP76.1 R55.2 R56.2 R57.2 U19.1 U19.14
3.3V19: C58.1 C60.1 JP80.1 R58.2 R59.2 R60.2 U20.1 U20.14
3.3V20: C61.1 C63.1 JP84.1 R61.2 R62.2 R63.2 U21.1 U21.14
3.3V21: C64.1 C66.1 JP88.1 R64.2 R65.2 R66.2 U22.1 U22.14
3.3V22: C67.1 C69.1 JP92.1 R67.2 R68.2 R69.2 U23.1 U23.14
3.3V23: C70.1 C72.1 JP96.1 R70.2 R71.2 R72.2 U24.1 U24.14
3.3V24: C73.1 C75.1 JP100.1 R73.2 R74.2 R75.2 U25.1 U25.14
3.3V25: C76.1 C78.1 JP104.1 R76.2 R77.2 R78.2 U26.1 U26.14
3.3V26: C79.1 C81.1 JP108.1 R79.2 R80.2 R81.2 U27.1 U27.14
3.3V27: C82.1 C84.1 JP112.1 R82.2 R83.2 R84.2 U28.1 U28.14
3.3V28: C85.1 C87.1 JP116.1 R85.2 R86.2 R87.2 U29.1 U29.14
3.3V29: C88.1 C90.1 JP120.1 R88.2 R89.2 R90.2 U30.1 U30.14
3.3V30: C91.1 C93.1 JP124.1 R91.2 R92.2 R93.2 U31.1 U31.14
3.3V31: C94.1 C96.1 JP128.1 R94.2 R95.2 R96.2 U32.1 U32.14
3.3V32: C97.1 C99.1 JP132.1 R97.2 R98.2 R99.2 U33.1 U33.14
3.3V33: C100.1 C102.1 JP136.1 R100.2 R101.2 R102.2 U34.1 U34.14
3.3V34: C103.1 C105.1 JP140.1 R103.2 R104.2 R105.2 U35.1 U35.14
3.3V35: C106.1 C108.1 JP144.1 R106.2 R107.2 R108.2 U36.1 U36.14
BYP: C2.1 U1.2
BYP1: C5.1 U2.2
BYP2: C8.1 U3.2
BYP3: C11.1 U4.2
BYP4: C14.1 U5.2
BYP5: C17.1 U6.2
BYP6: C20.1 U7.2
BYP7: C23.1 U8.2
BYP8: C26.1 U9.2
BYP9: C29.1 U10.2
BYP10: C32.1 U11.2
BYP11: C35.1 U12.2
BYP12: C38.1 U13.2
BYP13: C41.1 U14.2
BYP14: C44.1 U15.2
BYP15: C47.1 U16.2
BYP16: C50.1 U17.2
BYP17: C53.1 U18.2
BYP18: C56.1 U19.2
BYP19: C59.1 U20.2
BYP20: C62.1 U21.2
BYP21: C65.1 U22.2
BYP22: C68.1 U23.2
BYP23: C71.1 U24.2
BYP24: C74.1 U25.2
BYP25: C77.1 U26.2
BYP26: C80.1 U27.2
BYP27: C83.1 U28.2
BYP28: C86.1 U29.2
BYP29: C89.1 U30.2
BYP30: C92.1 U31.2
BYP31: C95.1 U32.2
BYP32: C98.1 U33.2
BYP33: C101.1 U34.2
BYP34: C104.1 U35.2
BYP35: C107.1 U36.2
GND: C1.2 C2.2 C3.2 JP5.6 SJ1.1 U1.5 U1.10 U1.12
GND1: C4.2 C5.2 C6.2 JP8.6 SJ2.1 U2.5 U2.10 U2.12
GND2: C7.2 C8.2 C9.2 JP12.6 SJ3.1 U3.5 U3.10 U3.12
GND3: C10.2 C11.2 C12.2 JP16.6 SJ4.1 U4.5 U4.10 U4.12
GND4: C13.2 C14.2 C15.2 JP20.6 SJ5.1 U5.5 U5.10 U5.12
GND5: C16.2 C17.2 C18.2 JP24.6 SJ6.1 U6.5 U6.10 U6.12
GND6: C19.2 C20.2 C21.2 JP28.6 SJ7.1 U7.5 U7.10 U7.12
GND7: C22.2 C23.2 C24.2 JP32.6 SJ8.1 U8.5 U8.10 U8.12
GND8: C25.2 C26.2 C27.2 JP36.6 SJ9.1 U9.5 U9.10 U9.12
GND9: C28.2 C29.2 C30.2 JP40.6 SJ10.1 U10.5 U10.10 U10.12
GND10: C31.2 C32.2 C33.2 JP44.6 SJ11.1 U11.5 U11.10 U11.12
GND11: C34.2 C35.2 C36.2 JP48.6 SJ12.1 U12.5 U12.10 U12.12
GND12: C37.2 C38.2 C39.2 JP52.6 SJ13.1 U13.5 U13.10 U13.12
GND13: C40.2 C41.2 C42.2 JP56.6 SJ14.1 U14.5 U14.10 U14.12
GND14: C43.2 C44.2 C45.2 JP60.6 SJ15.1 U15.5 U15.10 U15.12
GND15: C46.2 C47.2 C48.2 JP64.6 SJ16.1 U16.5 U16.10 U16.12
GND16: C49.2 C50.2 C51.2 JP68.6 SJ17.1 U17.5 U17.10 U17.12
GND17: C52.2 C53.2 C54.2 JP72.6 SJ18.1 U18.5 U18.10 U18.12
GND18: C55.2 C56.2 C57.2 JP76.6 SJ19.1 U19.5 U19.10 U19.12
GND19: C58.2 C59.2 C60.2 JP80.6 SJ20.1 U20.5 U20.10 U20.12
GND20: C61.2 C62.2 C63.2 JP84.6 SJ21.1 U21.5 U21.10 U21.12
GND21: C64.2 C65.2 C66.2 JP88.6 SJ22.1 U22.5 U22.10 U22.12
GND22: C67.2 C68.2 C69.2 JP92.6 SJ23.1 U23.5 U23.10 U23.12
GND23: C70.2 C71.2 C72.2 JP96.6 SJ24.1 U24.5 U24.10 U24.12
GND24: C73.2 C74.2 C75.2 JP100.6 SJ25.1 U25.5 U25.10 U25.12
GND25: C76.2 C77.2 C78.2 JP104.6 SJ26.1 U26.5 U26.10 U26.12
GND26: C79.2 C80.2 C81.2 JP108.6 SJ27.1 U27.5 U27.10 U27.12
GND27: C82.2 C83.2 C84.2 JP112.6 SJ28.1 U28.5 U28.10 U28.12
GND28: C85.2 C86.2 C87.2 JP116.6 SJ29.1 U29.5 U29.10 U29.12
GND29: C88.2 C89.2 C90.2 JP120.6 SJ30.1 U30.5 U30.10 U30.12
GND30: C91.2 C92.2 C93.2 JP124.6 SJ31.1 U31.5 U31.10 U31.12
GND31: C94.2 C95.2 C96.2 JP128.6 SJ32.1 U32.5 U32.10 U32.12
GND32: C97.2 C98.2 C99.2 JP132.6 SJ33.1 U33.5 U33.10 U33.12
GND33: C100.2 C101.2 C102.2 JP136.6 SJ34.1 U34.5 U34.10 U34.12
GND34: C103.2 C104.2 C105.2 JP140.6 SJ35.1 U35.5 U35.10 U35.12
GND35: C106.2 C107.2 C108.2 JP144.6 SJ36.1 U36.5 U36.10 U36.12
INT1: JP5.5 U1.11
INT2: JP5.4 U1.9
INT3: JP8.4 U2.9
INT4: JP8.5 U2.11
INT5: JP12.4 U3.9
INT6: JP12.5 U3.11
INT7: JP16.4 U4.9
INT8: JP16.5 U4.11
INT9: JP20.4 U5.9
INT10: JP20.5 U5.11
INT11: JP24.4 U6.9
INT12: JP24.5 U6.11
INT13: JP28.4 U7.9
INT14: JP28.5 U7.11
INT15: JP32.4 U8.9
INT16: JP32.5 U8.11
INT17: JP36.4 U9.9
INT18: JP36.5 U9.11
INT19: JP40.4 U10.9
INT20: JP40.5 U10.11
INT21: JP44.4 U11.9
INT22: JP44.5 U11.11
INT23: JP48.4 U12.9
INT24: JP48.5 U12.11
INT25: JP52.4 U13.9
INT26: JP52.5 U13.11
INT27: JP56.4 U14.9
INT28: JP56.5 U14.11
INT29: JP60.4 U15.9
INT30: JP60.5 U15.11
INT31: JP64.4 U16.9
INT32: JP64.5 U16.11
INT33: JP68.4 U17.9
INT34: JP68.5 U17.11
INT35: JP72.4 U18.9
INT36: JP72.5 U18.11
INT37: JP76.4 U19.9
INT38: JP76.5 U19.11
INT39: JP80.4 U20.9
INT40: JP80.5 U20.11
INT41: JP84.4 U21.9
INT42: JP84.5 U21.11
INT43: JP88.4 U22.9
INT44: JP88.5 U22.11
INT45: JP92.4 U23.9
INT46: JP92.5 U23.11
INT47: JP96.4 U24.9
INT48: JP96.5 U24.11
INT49: JP100.4 U25.9
INT50: JP100.5 U25.11
INT51: JP104.4 U26.9
INT52: JP104.5 U26.11
INT53: JP108.4 U27.9
INT54: JP108.5 U27.11
INT55: JP112.4 U28.9
INT56: JP112.5 U28.11
INT57: JP116.4 U29.9
INT58: JP116.5 U29.11
INT59: JP120.4 U30.9
INT60: JP120.5 U30.11
INT61: JP124.4 U31.9
INT62: JP124.5 U31.11
INT63: JP128.4 U32.9
INT64: JP128.5 U32.11
INT65: JP132.4 U33.9
INT66: JP132.5 U33.11
INT67: JP136.4 U34.9
INT68: JP136.5 U34.11
INT69: JP140.4 U35.9
INT70: JP140.5 U35.11
INT71: JP144.4 U36.9
INT72: JP144.5 U36.11
SA0: R3.1 SJ1.2 U1.7
SA1: R6.1 SJ2.2 U2.7
SA2: R9.1 SJ3.2 U3.7
SA3: R12.1 SJ4.2 U4.7
SA4: R15.1 SJ5.2 U5.7
SA5: R18.1 SJ6.2 U6.7
SA6: R21.1 SJ7.2 U7.7
SA7: R24.1 SJ8.2 U8.7
SA8: R27.1 SJ9.2 U9.7
SA9: R30.1 SJ10.2 U10.7
SA10: R33.1 SJ11.2 U11.7
SA11: R36.1 SJ12.2 U12.7
SA12: R39.1 SJ13.2 U13.7
SA13: R42.1 SJ14.2 U14.7
SA14: R45.1 SJ15.2 U15.7
SA15: R48.1 SJ16.2 U16.7
SA16: R51.1 SJ17.2 U17.7
SA17: R54.1 SJ18.2 U18.7
SA18: R57.1 SJ19.2 U19.7
SA19: R60.1 SJ20.2 U20.7
SA20: R63.1 SJ21.2 U21.7
SA21: R66.1 SJ22.2 U22.7
SA22: R69.1 SJ23.2 U23.7
SA23: R72.1 SJ24.2 U24.7
SA24: R75.1 SJ25.2 U25.7
SA25: R78.1 SJ26.2 U26.7
SA26: R81.1 SJ27.2 U27.7
SA27: R84.1 SJ28.2 U28.7
SA28: R87.1 SJ29.2 U29.7
SA29: R90.1 SJ30.2 U30.7
SA30: R93.1 SJ31.2 U31.7
SA31: R96.1 SJ32.2 U32.7
SA32: R99.1 SJ33.2 U33.7
SA33: R102.1 SJ34.2 U34.7
SA34: R105.1 SJ35.2 U35.7
SA35: R108.1 SJ36.2 U36.7
SCL: JP5.3 R1.1 U1.4
SCL1: JP8.3 R4.1 U2.4
SCL2: JP12.3 R7.1 U3.4
SCL3: JP16.3 R10.1 U4.4
SCL4: JP20.3 R13.1 U5.4
SCL5: JP24.3 R16.1 U6.4
SCL6: JP28.3 R19.1 U7.4
SCL7: JP32.3 R22.1 U8.4
SCL8: JP36.3 R25.1 U9.4
SCL9: JP40.3 R28.1 U10.4
SCL10: JP44.3 R31.1 U11.4
SCL11: JP48.3 R34.1 U12.4
SCL12: JP52.3 R37.1 U13.4
SCL13: JP56.3 R40.1 U14.4
SCL14: JP60.3 R43.1 U15.4
SCL15: JP64.3 R46.1 U16.4
SCL16: JP68.3 R49.1 U17.4
SCL17: JP72.3 R52.1 U18.4
SCL18: JP76.3 R55.1 U19.4
SCL19: JP80.3 R58.1 U20.4
SCL20: JP84.3 R61.1 U21.4
SCL21: JP88.3 R64.1 U22.4
SCL22: JP92.3 R67.1 U23.4
SCL23: JP96.3 R70.1 U24.4
SCL24: JP100.3 R73.1 U25.4
SCL25: JP104.3 R76.1 U26.4
SCL26: JP108.3 R79.1 U27.4
SCL27: JP112.3 R82.1 U28.4
SCL28: JP116.3 R85.1 U29.4
SCL29: JP120.3 R88.1 U30.4
SCL30: JP124.3 R91.1 U31.4
SCL31: JP128.3 R94.1 U32.4
SCL32: JP132.3 R97.1 U33.4
SCL33: JP136.3 R100.1 U34.4
SCL34: JP140.3 R103.1 U35.4
SCL35: JP144.3 R106.1 U36.4
SDA: JP5.2 R2.1 U1.6
SDA1: JP8.2 R5.1 U2.6
SDA2: JP12.2 R8.1 U3.6
SDA3: JP16.2 R11.1 U4.6
SDA4: JP20.2 R14.1 U5.6
SDA5: JP24.2 R17.1 U6.6
SDA6: JP28.2 R20.1 U7.6
SDA7: JP32.2 R23.1 U8.6
SDA8: JP36.2 R26.1 U9.6
SDA9: JP40.2 R29.1 U10.6
SDA10: JP44.2 R32.1 U11.6
SDA11: JP48.2 R35.1 U12.6
SDA12: JP52.2 R38.1 U13.6
SDA13: JP56.2 R41.1 U14.6
SDA14: JP60.2 R44.1 U15.6
SDA15: JP64.2 R47.1 U16.6
SDA16: JP68.2 R50.1 U17.6
SDA17: JP72.2 R53.1 U18.6
SDA18: JP76.2 R56.1 U19.6
SDA19: JP80.2 R59.1 U20.6
SDA20: JP84.2 R62.1 U21.6
SDA21: JP88.2 R65.1 U22.6
SDA22: JP92.2 R68.1 U23.6
SDA23: JP96.2 R71.1 U24.6
SDA24: JP100.2 R74.1 U25.6
SDA25: JP104.2 R77.1 U26.6
SDA26: JP108.2 R80.1 U27.6
SDA27: JP112.2 R83.1 U28.6
SDA28: JP116.2 R86.1 U29.6
SDA29: JP120.2 R89.1 U30.6
SDA30: JP124.2 R92.1 U31.6
SDA31: JP128.2 R95.1 U32.6
SDA32: JP132.2 R98.1 U33.6
SDA33: JP136.2 R101.1 U34.6
SDA34: JP140.2 R104.1 U35.6
SDA35: JP144.2 R107.1 U36.6

## Tracks (layer width: path | path; a pad name or v marks a point on that pad's centre or on a via)
3.3V  (via drill 0.51)
  Top 0.254: R2.2 R1.2 | 17.63,15.75 R3.2 16.76,15.75 | 8.13,13.12 R2.2 | U1.1 15.48,16.37 15.62,16.51 16.26,16.51 16.76,16 16.76,15.75 | 16.76,15.75 16.76,14.48 | 16.76,13.98 16.76,13.21 | 16.76,13.21 v16.76,11.95 v16.76,11.94 | C1.1 16.76,14.48 | C3.1 16.76,13.21 | U1.14 16.76,13.98 | 16.76,13.98 16.76,14.48 | JP5.1 8.13,11.81 7.75,12.19 7.75,13.42 R2.2
  Bottom 0.254: v16.76,11.94 14.48,11.94 13.21,10.67 10.67,10.67 JP5.1
3.3V1  (via drill 0.51)
  Top 0.254: R5.2 R4.2 | 33.38,15.75 R6.2 32.51,15.75 | 23.88,13.12 R5.2 | U2.1 31.23,16.37 31.37,16.51 32,16.51 32.51,16 32.51,15.75 | 32.51,15.75 32.51,14.48 | 32.51,13.98 32.51,13.21 | 32.51,13.21 32.51,11.95 v32.5,11.94 | C4.1 32.51,14.48 | C6.1 32.51,13.21 | U2.14 32.51,13.98 | 32.51,13.98 32.51,14.48 | JP8.1 23.88,11.81 23.5,12.19 23.5,13.42 R5.2
  Bottom 0.254: v32.5,11.94 30.23,11.94 28.96,10.67 26.42,10.67 JP8.1
3.3V2  (via drill 0.51)
  Top 0.254: R8.2 R7.2 | 49.13,15.75 R9.2 48.26,15.75 | 39.62,13.12 R8.2 | U3.1 46.97,16.37 47.12,16.51 47.75,16.51 48.26,16 48.26,15.75 | 48.26,15.75 48.26,14.48 | 48.26,13.98 48.26,13.21 | 48.26,13.21 v48.26,11.95 v48.25,11.94 | C7.1 48.26,14.48 | C9.1 48.26,13.21 | U3.14 48.26,13.98 | 48.26,13.98 48.26,14.48 | JP12.1 39.62,11.81 39.24,12.19 39.24,13.42 R8.2
  Bottom 0.254: v48.25,11.94 45.97,11.94 44.7,10.67 42.16,10.67 JP12.1
3.3V3  (via drill 0.51)
  Top 0.254: R11.2 R10.2 | 64.88,15.75 R12.2 64.01,15.75 | 55.37,13.12 R11.2 | U4.1 62.72,16.37 62.87,16.51 63.5,16.51 64.01,16 64.01,15.75 | 64.01,15.75 64.01,14.48 | 64.01,13.98 64.01,13.21 | 64.01,13.21 v64.01,11.95 v64,11.94 | C10.1 64.01,14.48 | C12.1 64.01,13.21 | U4.14 64.01,13.98 | 64.01,13.98 64.01,14.48 | JP16.1 55.37,11.81 54.99,12.19 54.99,13.42 R11.2
  Bottom 0.254: v64,11.94 61.72,11.94 60.45,10.67 57.91,10.67 JP16.1
3.3V4  (via drill 0.51)
  Top 0.254: R14.2 R13.2 | 80.62,15.75 R15.2 79.76,15.75 | 71.12,13.12 R14.2 | U5.1 78.47,16.37 78.61,16.51 79.25,16.51 79.76,16 79.76,15.75 | 79.76,15.75 79.76,14.48 | 79.76,13.98 79.76,13.21 | 79.76,13.21 v79.76,11.95 v79.75,11.94 | C13.1 79.76,14.48 | C15.1 79.76,13.21 | U5.14 79.76,13.98 | 79.76,13.98 79.76,14.48 | JP20.1 71.12,11.81 70.74,12.19 70.74,13.42 R14.2
  Bottom 0.254: v79.75,11.94 77.47,11.94 76.2,10.67 73.66,10.67 JP20.1
3.3V5  (via drill 0.51)
  Top 0.254: R17.2 R16.2 | 96.37,15.75 R18.2 95.5,15.75 | 86.87,13.12 R17.2 | U6.1 94.22,16.37 94.36,16.51 95,16.51 95.5,16 95.5,15.75 | 95.5,15.75 95.5,14.48 | 95.5,13.98 95.5,13.21 | 95.5,13.21 v95.5,11.95 v95.5,11.94 | C16.1 95.5,14.48 | C18.1 95.5,13.21 | U6.14 95.5,13.98 | 95.5,13.98 95.5,14.48 | JP24.1 86.87,11.81 86.49,12.19 86.49,13.42 R17.2
  Bottom 0.254: v95.5,11.94 93.22,11.94 91.95,10.67 89.41,10.67 JP24.1
3.3V6  (via drill 0.51)
  Top 0.254: R20.2 R19.2 | 17.63,31.5 R21.2 16.76,31.5 | 8.13,28.87 R20.2 | U7.1 15.48,32.12 15.62,32.26 16.26,32.26 16.76,31.75 16.76,31.5 | 16.76,31.5 16.76,30.23 | 16.76,29.73 16.76,28.96 | 16.76,28.96 v16.76,27.69 | C19.1 16.76,30.23 | C21.1 16.76,28.96 | U7.14 16.76,29.73 | 16.76,29.73 16.76,30.23 | JP28.1 8.13,27.56 7.75,27.94 7.75,29.17 R20.2
  Bottom 0.254: v16.76,27.69 14.48,27.69 13.21,26.42 10.67,26.42 JP28.1
3.3V7  (via drill 0.51)
  Top 0.254: R23.2 R22.2 | 33.38,31.5 R24.2 32.51,31.5 | 23.88,28.87 R23.2 | U8.1 31.23,32.12 31.37,32.26 32,32.26 32.51,31.75 32.51,31.5 | 32.51,31.5 32.51,30.23 | 32.51,29.73 32.51,28.96 | 32.51,28.96 32.51,27.69 v32.5,27.69 | C22.1 32.51,30.23 | C24.1 32.51,28.96 | U8.14 32.51,29.73 | 32.51,29.73 32.51,30.23 | JP32.1 23.88,27.56 23.5,27.94 23.5,29.17 R23.2
  Bottom 0.254: v32.5,27.69 30.23,27.69 28.96,26.42 26.42,26.42 JP32.1
3.3V8  (via drill 0.51)
  Top 0.254: R26.2 R25.2 | 49.13,31.5 R27.2 48.26,31.5 | 39.62,28.87 R26.2 | U9.1 46.97,32.12 47.12,32.26 47.75,32.26 48.26,31.75 48.26,31.5 | 48.26,31.5 48.26,30.23 | 48.26,29.73 48.26,28.96 | 48.26,28.96 v48.26,27.69 v48.25,27.69 | C25.1 48.26,30.23 | C27.1 48.26,28.96 | U9.14 48.26,29.73 | 48.26,29.73 48.26,30.23 | JP36.1 39.62,27.56 39.24,27.94 39.24,29.17 R26.2
  Bottom 0.254: v48.25,27.69 45.97,27.69 44.7,26.42 42.16,26.42 JP36.1
3.3V9  (via drill 0.51)
  Top 0.254: R29.2 R28.2 | 64.88,31.5 R30.2 64.01,31.5 | 55.37,28.87 R29.2 | U10.1 62.72,32.12 62.87,32.26 63.5,32.26 64.01,31.75 64.01,31.5 | 64.01,31.5 64.01,30.23 | 64.01,29.73 64.01,28.96 | 64.01,28.96 v64.01,27.69 v64,27.69 | C28.1 64.01,30.23 | C30.1 64.01,28.96 | U10.14 64.01,29.73 | 64.01,29.73 64.01,30.23 | JP40.1 55.37,27.56 54.99,27.94 54.99,29.17 R29.2
  Bottom 0.254: v64,27.69 61.72,27.69 60.45,26.42 57.91,26.42 JP40.1
3.3V10  (via drill 0.51)
  Top 0.254: R32.2 R31.2 | 80.62,31.5 R33.2 79.76,31.5 | 71.12,28.87 R32.2 | U11.1 78.47,32.12 78.61,32.26 79.25,32.26 79.76,31.75 79.76,31.5 | 79.76,31.5 79.76,30.23 | 79.76,29.73 79.76,28.96 | 79.76,28.96 v79.76,27.69 v79.75,27.69 | C31.1 79.76,30.23 | C33.1 79.76,28.96 | U11.14 79.76,29.73 | 79.76,29.73 79.76,30.23 | JP44.1 71.12,27.56 70.74,27.94 70.74,29.17 R32.2
  Bottom 0.254: v79.75,27.69 77.47,27.69 76.2,26.42 73.66,26.42 JP44.1
3.3V11  (via drill 0.51)
  Top 0.254: R35.2 R34.2 | 96.37,31.5 R36.2 95.5,31.5 | 86.87,28.87 R35.2 | U12.1 94.22,32.12 94.36,32.26 95,32.26 95.5,31.75 95.5,31.5 | 95.5,31.5 95.5,30.23 | 95.5,29.73 95.5,28.96 | 95.5,28.96 v95.5,27.69 | C34.1 95.5,30.23 | C36.1 95.5,28.96 | U12.14 95.5,29.73 | 95.5,29.73 95.5,30.23 | JP48.1 86.87,27.56 86.49,27.94 86.49,29.17 R35.2
  Bottom 0.254: v95.5,27.69 93.22,27.69 91.95,26.42 89.41,26.42 JP48.1
3.3V12  (via drill 0.51)
  Top 0.254: R38.2 R37.2 | 17.63,47.25 R39.2 16.76,47.24 | 8.13,44.62 R38.2 | U13.1 15.48,47.86 15.62,48.01 16.26,48.01 16.76,47.5 16.76,47.24 | 16.76,47.24 16.76,45.97 | 16.76,45.47 16.76,44.7 | 16.76,44.7 16.76,43.44 v16.76,43.43 | C37.1 16.76,45.97 | C39.1 16.76,44.7 | U13.14 16.76,45.47 | 16.76,45.47 16.76,45.97 | JP52.1 8.13,43.31 7.75,43.69 7.75,44.92 R38.2
  Bottom 0.254: v16.76,43.43 14.48,43.43 13.21,42.16 10.67,42.16 JP52.1
3.3V13  (via drill 0.51)
  Top 0.254: R41.2 R40.2 | 33.38,47.25 R42.2 32.51,47.24 | 23.88,44.62 R41.2 | U14.1 31.23,47.86 31.37,48.01 32,48.01 32.51,47.5 32.51,47.24 | 32.51,47.24 32.51,45.97 | 32.51,45.47 32.51,44.7 | 32.51,44.7 32.51,43.44 v32.5,43.43 | C40.1 32.51,45.97 | C42.1 32.51,44.7 | U14.14 32.51,45.47 | 32.51,45.47 32.51,45.97 | JP56.1 23.88,43.31 23.5,43.69 23.5,44.92 R41.2
  Bottom 0.254: v32.5,43.43 30.23,43.43 28.96,42.16 26.42,42.16 JP56.1
3.3V14  (via drill 0.51)
  Top 0.254: R44.2 R43.2 | 49.13,47.25 R45.2 48.26,47.24 | 39.62,44.62 R44.2 | U15.1 46.97,47.86 47.12,48.01 47.75,48.01 48.26,47.5 48.26,47.24 | 48.26,47.24 48.26,45.97 | 48.26,45.47 48.26,44.7 | 48.26,44.7 48.26,43.44 v48.25,43.43 | C43.1 48.26,45.97 | C45.1 48.26,44.7 | U15.14 48.26,45.47 | 48.26,45.47 48.26,45.97 | JP60.1 39.62,43.31 39.24,43.69 39.24,44.92 R44.2
  Bottom 0.254: v48.25,43.43 45.97,43.43 44.7,42.16 42.16,42.16 JP60.1
3.3V15  (via drill 0.51)
  Top 0.254: R47.2 R46.2 | 64.88,47.25 R48.2 64.01,47.24 | 55.37,44.62 R47.2 | U16.1 62.72,47.86 62.87,48.01 63.5,48.01 64.01,47.5 64.01,47.24 | 64.01,47.24 64.01,45.97 | 64.01,45.47 64.01,44.7 | 64.01,44.7 64.01,43.44 v64,43.43 | C46.1 64.01,45.97 | C48.1 64.01,44.7 | U16.14 64.01,45.47 | 64.01,45.47 64.01,45.97 | JP64.1 55.37,43.31 54.99,43.69 54.99,44.92 R47.2
  Bottom 0.254: v64,43.43 61.72,43.43 60.45,42.16 57.91,42.16 JP64.1
3.3V16  (via drill 0.51)
  Top 0.254: R50.2 R49.2 | 80.62,47.25 R51.2 79.76,47.24 | 71.12,44.62 R50.2 | U17.1 78.47,47.86 78.61,48.01 79.25,48.01 79.76,47.5 79.76,47.24 | 79.76,47.24 79.76,45.97 | 79.76,45.47 79.76,44.7 | 79.76,44.7 79.76,43.44 v79.75,43.43 | C49.1 79.76,45.97 | C51.1 79.76,44.7 | U17.14 79.76,45.47 | 79.76,45.47 79.76,45.97 | JP68.1 71.12,43.31 70.74,43.69 70.74,44.92 R50.2
  Bottom 0.254: v79.75,43.43 77.47,43.43 76.2,42.16 73.66,42.16 JP68.1
3.3V17  (via drill 0.51)
  Top 0.254: R53.2 R52.2 | 96.37,47.25 R54.2 95.5,47.24 | 86.87,44.62 R53.2 | U18.1 94.22,47.86 94.36,48.01 95,48.01 95.5,47.5 95.5,47.24 | 95.5,47.24 95.5,45.97 | 95.5,45.47 95.5,44.7 | 95.5,44.7 95.5,43.44 v95.5,43.43 | C52.1 95.5,45.97 | C54.1 95.5,44.7 | U18.14 95.5,45.47 | 95.5,45.47 95.5,45.97 | JP72.1 86.87,43.31 86.49,43.69 86.49,44.92 R53.2
  Bottom 0.254: v95.5,43.43 93.22,43.43 91.95,42.16 89.41,42.16 JP72.1
3.3V18  (via drill 0.51)
  Top 0.254: R56.2 R55.2 | 17.63,63 R57.2 16.76,62.99 | 8.13,60.36 R56.2 | U19.1 15.48,63.61 15.62,63.75 16.26,63.75 16.76,63.25 16.76,62.99 | 16.76,62.99 16.76,61.72 | 16.76,61.22 16.76,60.45 | 16.76,60.45 v16.76,59.19 v16.76,59.18 | C55.1 16.76,61.72 | C57.1 16.76,60.45 | U19.14 16.76,61.22 | 16.76,61.22 16.76,61.72 | JP76.1 8.13,59.05 7.75,59.44 7.75,60.67 R56.2
  Bottom 0.254: v16.76,59.18 14.48,59.18 13.21,57.91 10.67,57.91 JP76.1
3.3V19  (via drill 0.51)
  Top 0.254: R59.2 R58.2 | 33.38,63 R60.2 32.51,62.99 | 23.88,60.36 R59.2 | U20.1 31.23,63.61 31.37,63.75 32,63.75 32.51,63.25 32.51,62.99 | 32.51,62.99 32.51,61.72 | 32.51,61.22 32.51,60.45 | 32.51,60.45 32.51,59.19 v32.5,59.18 | C58.1 32.51,61.72 | C60.1 32.51,60.45 | U20.14 32.51,61.22 | 32.51,61.22 32.51,61.72 | JP80.1 23.88,59.05 23.5,59.44 23.5,60.67 R59.2
  Bottom 0.254: v32.5,59.18 30.23,59.18 28.96,57.91 26.42,57.91 JP80.1
3.3V20  (via drill 0.51)
  Top 0.254: R62.2 R61.2 | 49.13,63 R63.2 48.26,62.99 | 39.62,60.36 R62.2 | U21.1 46.97,63.61 47.12,63.75 47.75,63.75 48.26,63.25 48.26,62.99 | 48.26,62.99 48.26,61.72 | 48.26,61.22 48.26,60.45 | 48.26,60.45 v48.26,59.19 v48.25,59.18 | C61.1 48.26,61.72 | C63.1 48.26,60.45 | U21.14 48.26,61.22 | 48.26,61.22 48.26,61.72 | JP84.1 39.62,59.05 39.24,59.44 39.24,60.67 R62.2
  Bottom 0.254: v48.25,59.18 45.97,59.18 44.7,57.91 42.16,57.91 JP84.1
3.3V21  (via drill 0.51)
  Top 0.254: R65.2 R64.2 | 64.88,63 R66.2 64.01,62.99 | 55.37,60.36 R65.2 | U22.1 62.72,63.61 62.87,63.75 63.5,63.75 64.01,63.25 64.01,62.99 | 64.01,62.99 64.01,61.72 | 64.01,61.22 64.01,60.45 | 64.01,60.45 v64.01,59.19 v64,59.18 | C64.1 64.01,61.72 | C66.1 64.01,60.45 | U22.14 64.01,61.22 | 64.01,61.22 64.01,61.72 | JP88.1 55.37,59.05 54.99,59.44 54.99,60.67 R65.2
  Bottom 0.254: v64,59.18 61.72,59.18 60.45,57.91 57.91,57.91 JP88.1
3.3V22  (via drill 0.51)
  Top 0.254: R68.2 R67.2 | 80.62,63 R69.2 79.76,62.99 | 71.12,60.36 R68.2 | U23.1 78.47,63.61 78.61,63.75 79.25,63.75 79.76,63.25 79.76,62.99 | 79.76,62.99 79.76,61.72 | 79.76,61.22 79.76,60.45 | 79.76,60.45 v79.76,59.19 v79.75,59.18 | C67.1 79.76,61.72 | C69.1 79.76,60.45 | U23.14 79.76,61.22 | 79.76,61.22 79.76,61.72 | JP92.1 71.12,59.05 70.74,59.44 70.74,60.67 R68.2
  Bottom 0.254: v79.75,59.18 77.47,59.18 76.2,57.91 73.66,57.91 JP92.1
3.3V23  (via drill 0.51)
  Top 0.254: R71.2 R70.2 | 96.37,63 R72.2 95.5,62.99 | 86.87,60.36 R71.2 | U24.1 94.22,63.61 94.36,63.75 95,63.75 95.5,63.25 95.5,62.99 | 95.5,62.99 95.5,61.72 | 95.5,61.22 95.5,60.45 | 95.5,60.45 v95.5,59.19 v95.5,59.18 | C70.1 95.5,61.72 | C72.1 95.5,60.45 | U24.14 95.5,61.22 | 95.5,61.22 95.5,61.72 | JP96.1 86.87,59.05 86.49,59.44 86.49,60.67 R71.2
  Bottom 0.254: v95.5,59.18 93.22,59.18 91.95,57.91 89.41,57.91 JP96.1
3.3V24  (via drill 0.51)
  Top 0.254: R74.2 R73.2 | 17.63,78.75 R75.2 16.76,78.74 | 8.13,76.11 R74.2 | U25.1 15.48,79.36 15.62,79.5 16.26,79.5 16.76,78.99 16.76,78.74 | 16.76,78.74 16.76,77.47 | 16.76,76.97 16.76,76.2 | 16.76,76.2 v16.76,74.94 v16.76,74.93 | C73.1 16.76,77.47 | C75.1 16.76,76.2 | U25.14 16.76,76.97 | 16.76,76.97 16.76,77.47 | JP100.1 8.13,74.8 7.75,75.18 7.75,76.42 R74.2
  Bottom 0.254: v16.76,74.93 14.48,74.93 13.21,73.66 10.67,73.66 JP100.1
3.3V25  (via drill 0.51)
  Top 0.254: R77.2 R76.2 | 33.38,78.75 R78.2 32.51,78.74 | 23.88,76.11 R77.2 | U26.1 31.23,79.36 31.37,79.5 32,79.5 32.51,78.99 32.51,78.74 | 32.51,78.74 32.51,77.47 | 32.51,76.97 32.51,76.2 | 32.51,76.2 32.51,74.94 v32.5,74.93 | C76.1 32.51,77.47 | C78.1 32.51,76.2 | U26.14 32.51,76.97 | 32.51,76.97 32.51,77.47 | JP104.1 23.88,74.8 23.5,75.18 23.5,76.42 R77.2
  Bottom 0.254: v32.5,74.93 30.23,74.93 28.96,73.66 26.42,73.66 JP104.1
3.3V26  (via drill 0.51)
  Top 0.254: R80.2 R79.2 | 49.13,78.75 R81.2 48.26,78.74 | 39.62,76.11 R80.2 | U27.1 46.97,79.36 47.12,79.5 47.75,79.5 48.26,78.99 48.26,78.74 | 48.26,78.74 48.26,77.47 | 48.26,76.97 48.26,76.2 | 48.26,76.2 v48.26,74.94 v48.25,74.93 | C79.1 48.26,77.47 | C81.1 48.26,76.2 | U27.14 48.26,76.97 | 48.26,76.97 48.26,77.47 | JP108.1 39.62,74.8 39.24,75.18 39.24,76.42 R80.2
  Bottom 0.254: v48.25,74.93 45.97,74.93 44.7,73.66 42.16,73.66 JP108.1
3.3V27  (via drill 0.51)
  Top 0.254: R83.2 R82.2 | 64.88,78.75 R84.2 64.01,78.74 | 55.37,76.11 R83.2 | U28.1 62.72,79.36 62.87,79.5 63.5,79.5 64.01,78.99 64.01,78.74 | 64.01,78.74 64.01,77.47 | 64.01,76.97 64.01,76.2 | 64.01,76.2 v64.01,74.94 v64,74.93 | C82.1 64.01,77.47 | C84.1 64.01,76.2 | U28.14 64.01,76.97 | 64.01,76.97 64.01,77.47 | JP112.1 55.37,74.8 54.99,75.18 54.99,76.42 R83.2
  Bottom 0.254: v64,74.93 61.72,74.93 60.45,73.66 57.91,73.66 JP112.1
3.3V28  (via drill 0.51)
  Top 0.254: R86.2 R85.2 | 80.62,78.75 R87.2 79.76,78.74 | 71.12,76.11 R86.2 | U29.1 78.47,79.36 78.61,79.5 79.25,79.5 79.76,78.99 79.76,78.74 | 79.76,78.74 79.76,77.47 | 79.76,76.97 79.76,76.2 | 79.76,76.2 v79.76,74.94 v79.75,74.93 | C85.1 79.76,77.47 | C87.1 79.76,76.2 | U29.14 79.76,76.97 | 79.76,76.97 79.76,77.47 | JP116.1 71.12,74.8 70.74,75.18 70.74,76.42 R86.2
  Bottom 0.254: v79.75,74.93 77.47,74.93 76.2,73.66 73.66,73.66 JP116.1
3.3V29  (via drill 0.51)